# Allegro board PMOD2BNCSIMPLE_v1_06_65mil.brd
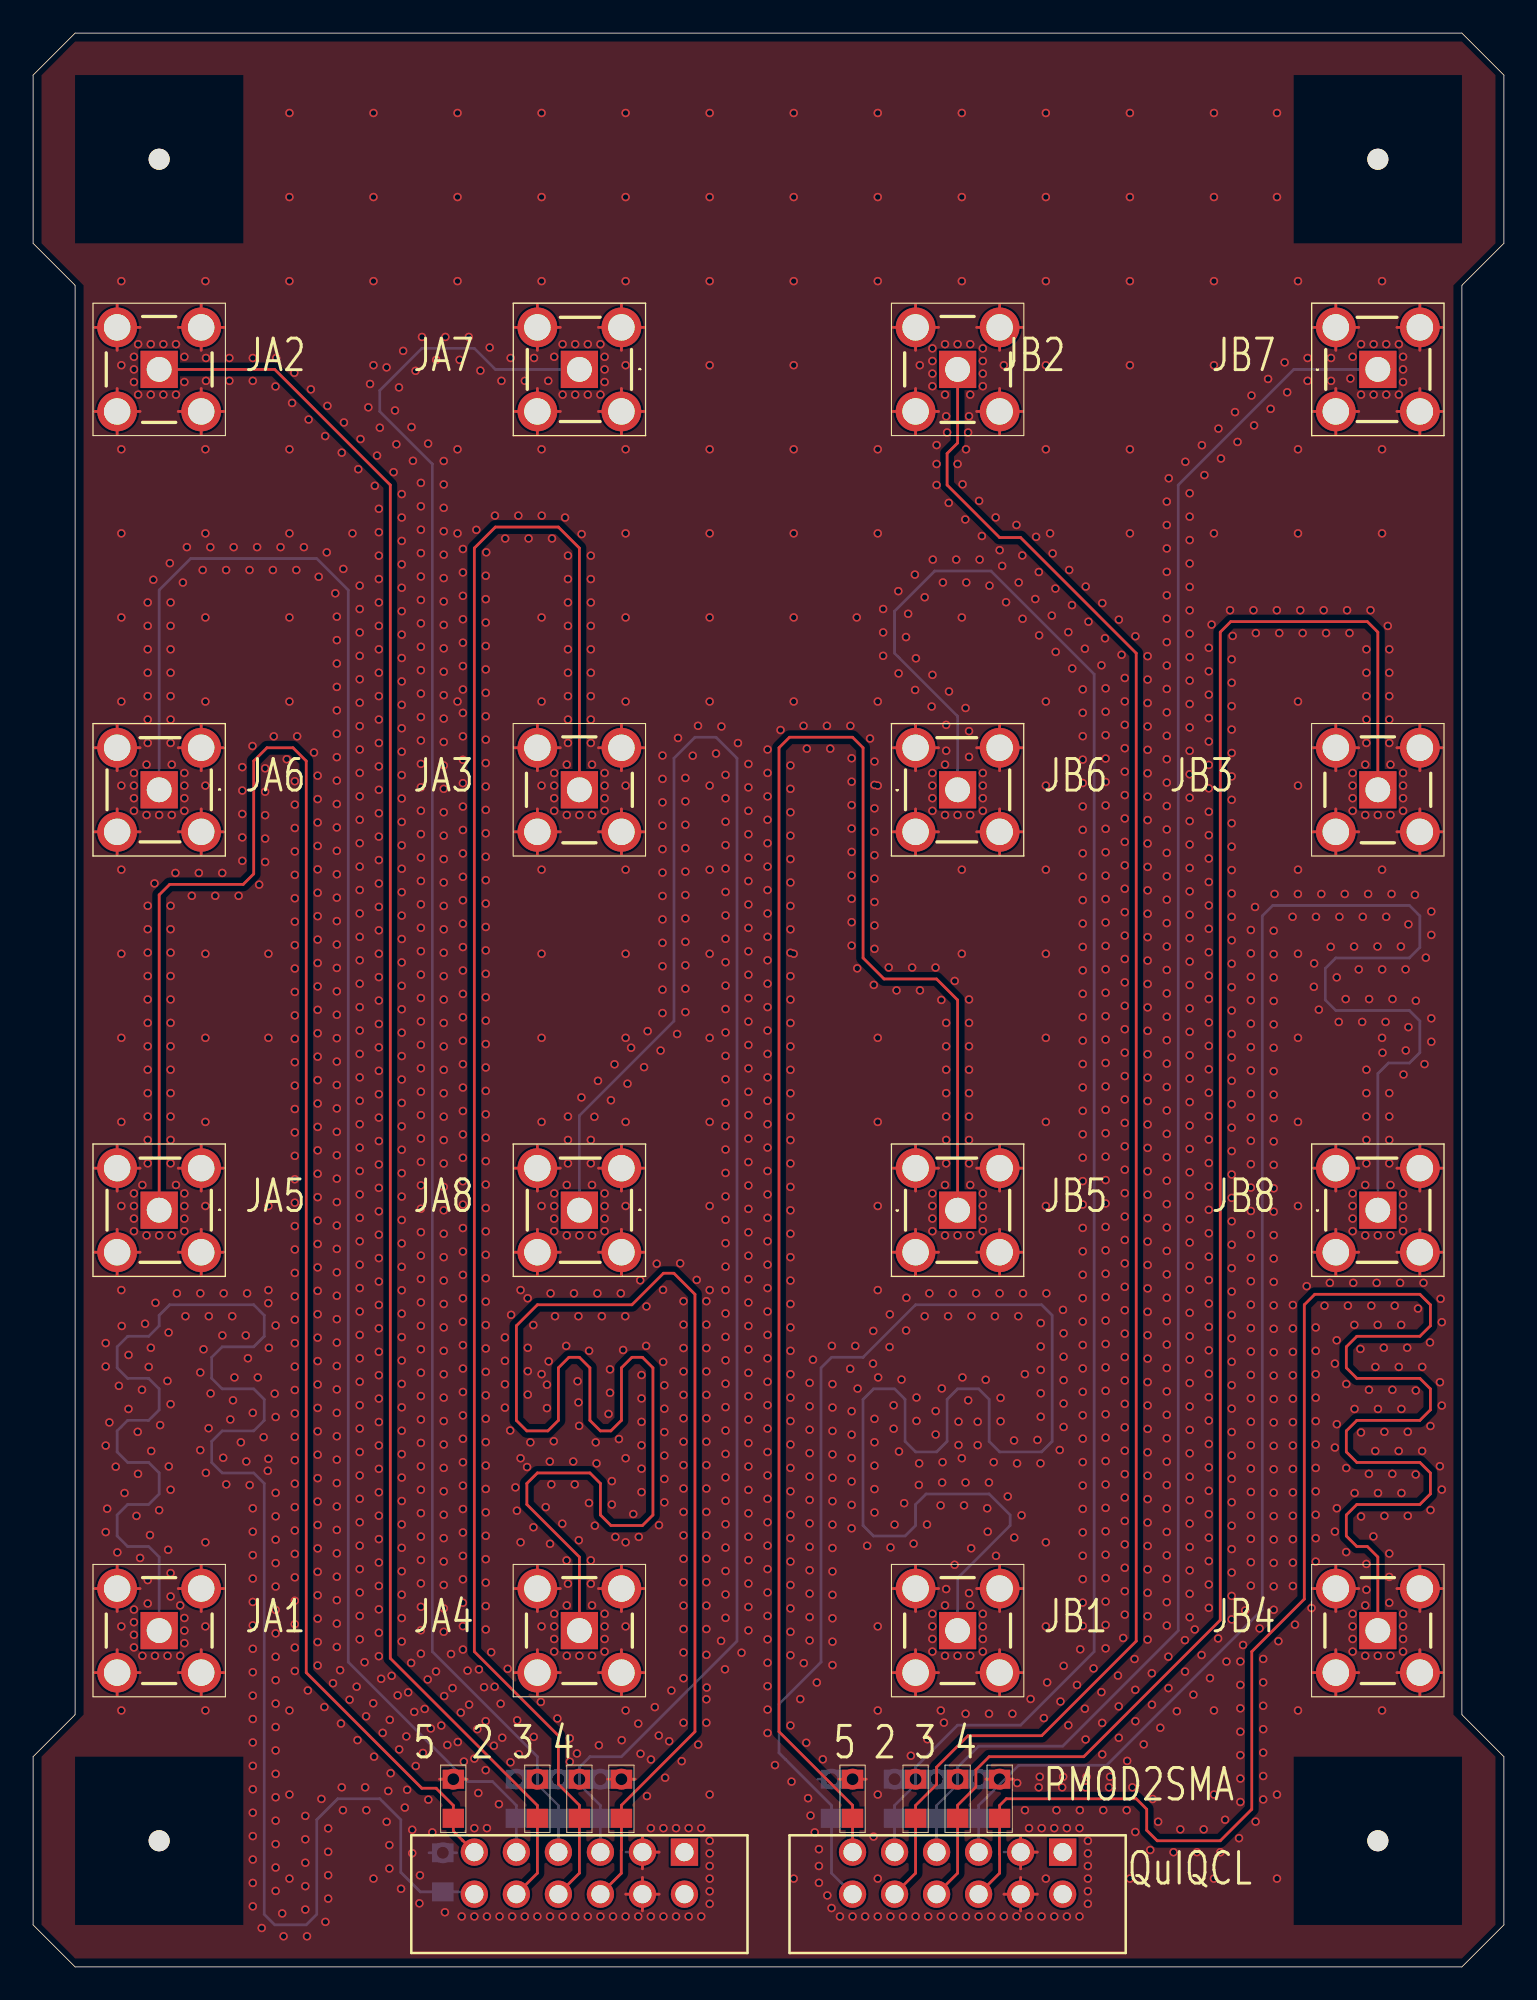
[diagram p0: board, top side]
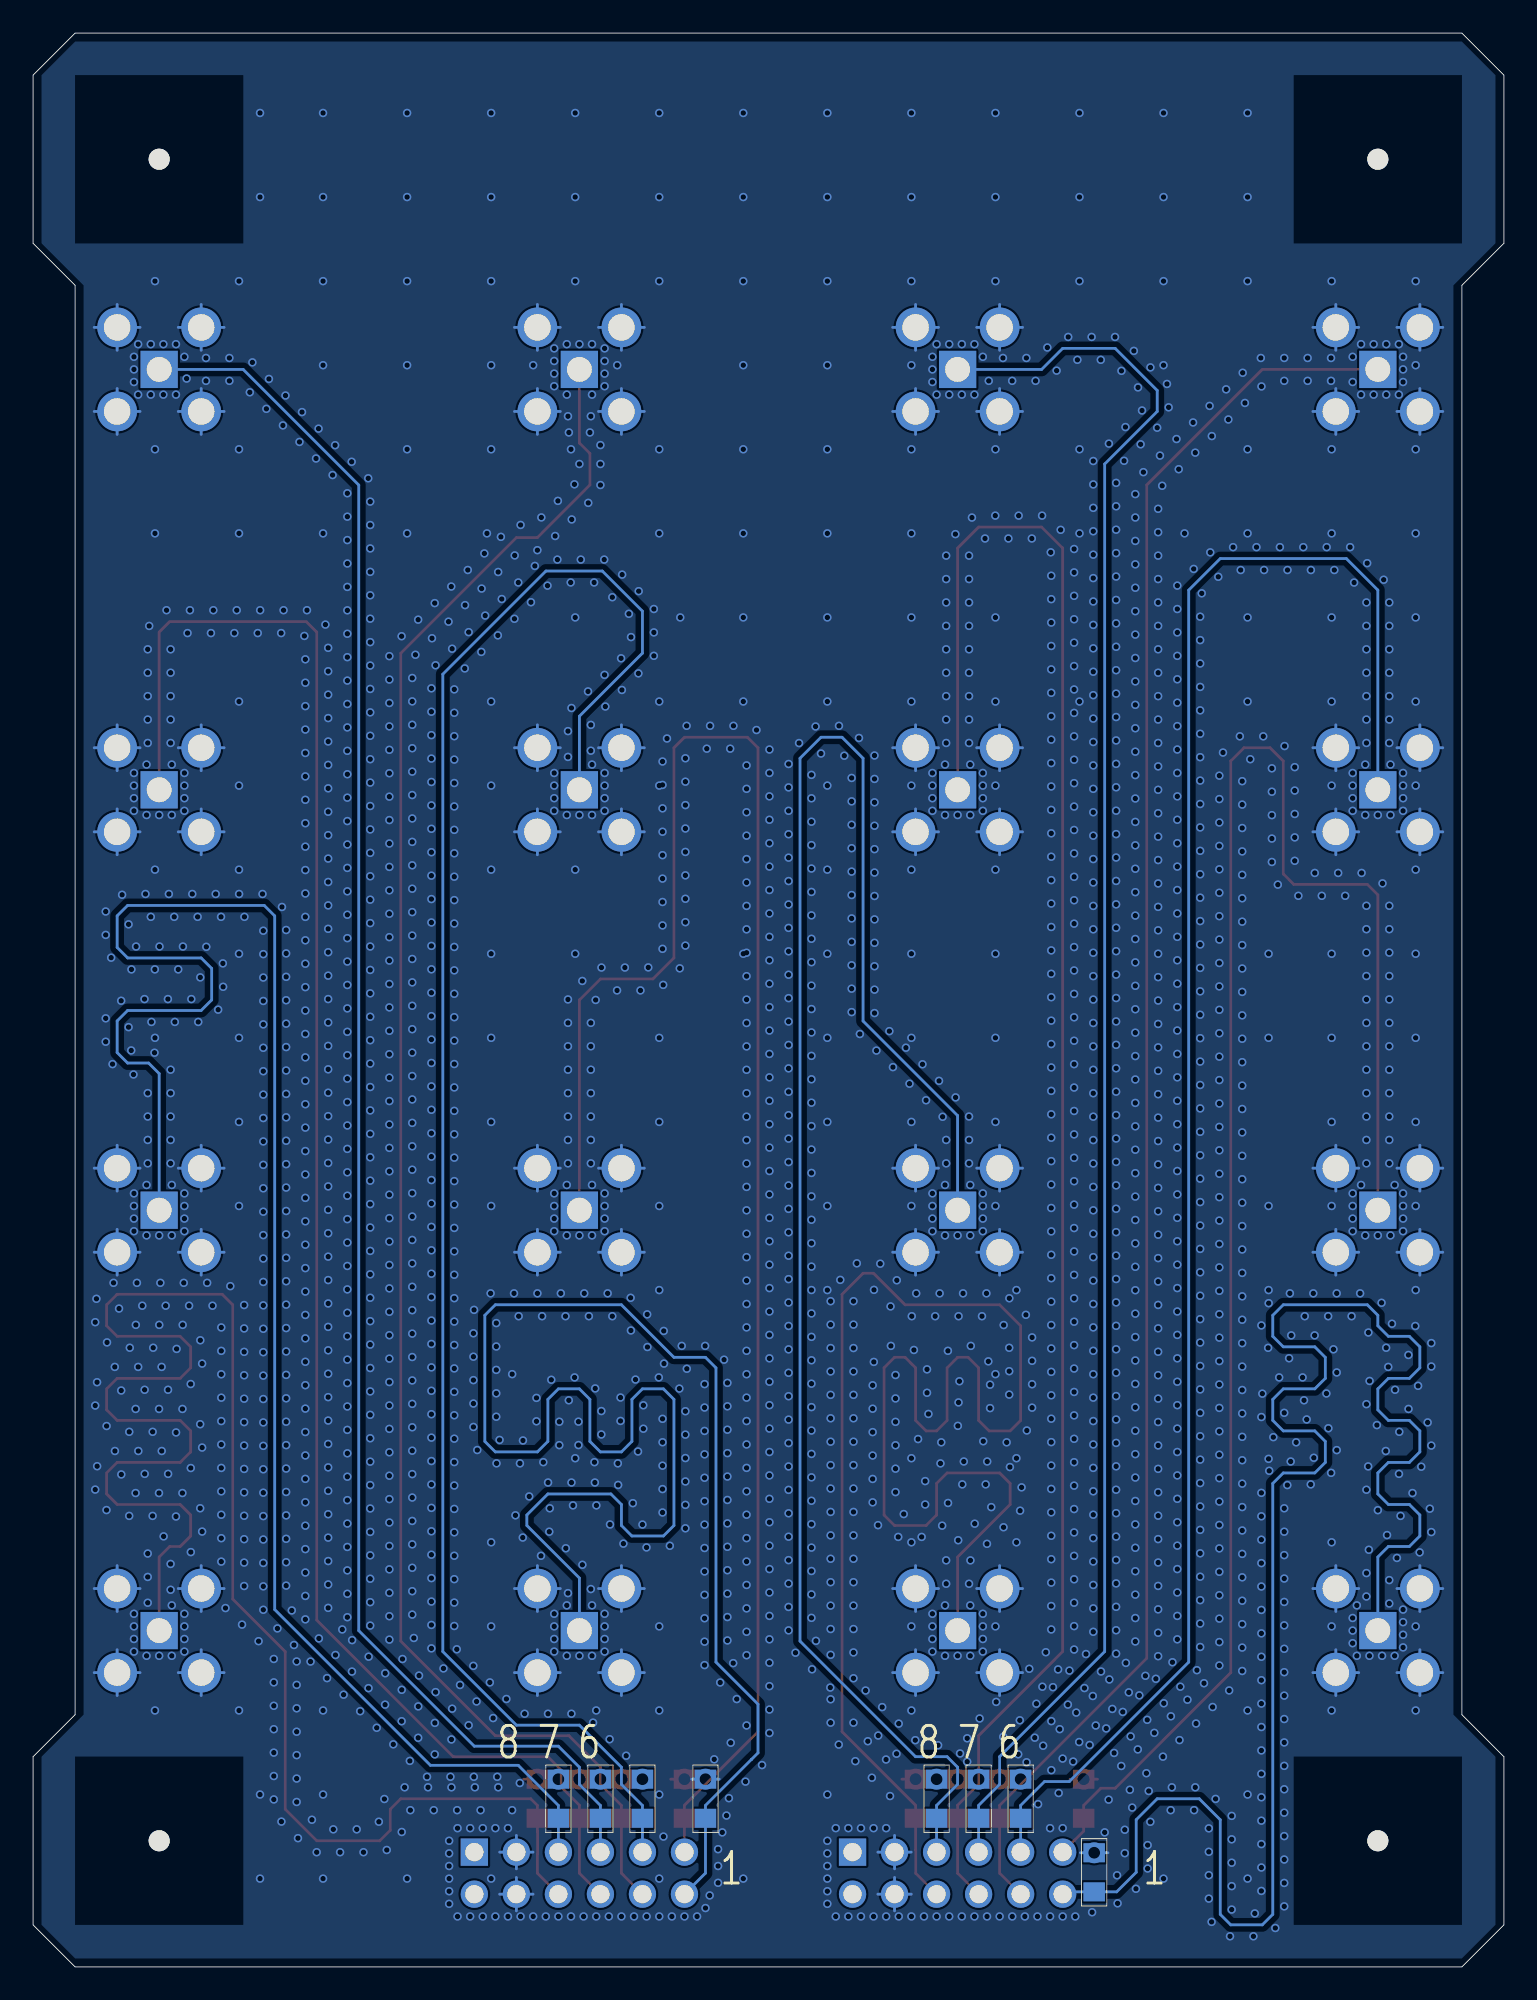
[diagram p1: board, bottom side, seen from below]

Outline 88.9 x 116.84 mm; copper layers: TOP, GND1, GND2, BOTTOM. Coordinates in mm from the lower left corner of the outline.
Outline path: 0,114.3 0,104.14 2.54,101.6 2.54,15.24 0,12.7 0,2.54 2.54,0 86.36,0 88.9,2.54 88.9,12.7 86.36,15.24 86.36,101.6 88.9,104.14 88.9,114.3 86.36,116.84 2.54,116.84 0,114.3

## Design rules (mm)
nets with their own width: min track width 0.165; nets GND N17882 N17894 N17906 N17918 N17930 N17948 N17973 N17998 N19655 N19661 N19667 N19673 N19679 N19687 N19697 N19707

## Placement (name value [footprint] x y rotation side)
J1  71764_0114  [717640112]  22.86 0.84 180 top
J2  71764_0114  [717640112]  45.72 0.84 180 top
NOREF  -  [unnamed]  81.28 7.62 0 top
NOREF#2  -  [unnamed]  7.62 7.62 0 top
NOREF#3  -  [unnamed]  7.62 109.22 0 top
NOREF#4  -  [unnamed]  81.28 109.22 0 top
R1  -  [RES_0805]  34.29 10.16 90 bottom
R2  -  [RES_0805]  31.75 10.16 90 bottom
R3  -  [RES_0805]  29.21 10.16 90 bottom
R4  -  [RES_0805]  25.4 10.16 90 top
R5  -  [RES_0805]  24.77 5.71 90 bottom
R6  -  [RES_0805]  30.48 10.16 90 top
R7  -  [RES_0805]  33.02 10.16 90 top
R8  -  [RES_0805]  35.56 10.16 90 top
R9  -  [RES_0805]  57.15 10.16 90 bottom
R10  -  [RES_0805]  54.61 10.16 90 bottom
R11  -  [RES_0805]  52.07 10.16 90 bottom
R12  -  [RES_0805]  49.53 10.16 90 top
R13  -  [RES_0805]  48.26 10.16 90 bottom
R14  -  [RES_0805]  53.34 10.16 90 top
R15  -  [RES_0805]  55.88 10.16 90 top
R16  -  [RES_0805]  58.42 10.16 90 top
U1  -  [SMA-R-RA]  7.62 45.72 180 top
U2  -  [SMAFST_PCBN]  7.62 20.32 180 top
U3  -  [SMA-R-RA]  7.62 71.12 180 top
U4  -  [SMAFST_PCBN]  7.62 96.52 180 top
U5  -  [SMA-R-RA]  33.02 96.52 180 top
U6  -  [SMAFST_PCBN]  33.02 71.12 180 top
U7  -  [SMA-R-RA]  33.02 45.72 180 top
U8  -  [SMAFST_PCBN]  33.02 20.32 180 top
U9  -  [SMA-R-RA]  55.88 45.72 0 top
U10  -  [SMAFST_PCBN]  55.88 20.32 180 top
U11  -  [SMA-R-RA]  55.88 71.12 0 top
U12  -  [SMAFST_PCBN]  55.88 96.52 180 top
U13  -  [SMA-R-RA]  81.28 96.52 0 top
U14  -  [SMAFST_PCBN]  81.28 71.12 180 top
U15  -  [SMA-R-RA]  81.28 45.72 0 top
U16  -  [SMAFST_PCBN]  81.28 20.32 180 top

## Library data of the parts
J1 J2 = 71764_0114
R1-R3 R5-R16 = RES_0805
R4 = RES_0805: signal model: resistorPack_850
U1 U3 U5 U7 U9 U11 U13 U15 = SMA-R-RA
U2 U4 U6 U8 U10 U12 U14 U16 = SMAFST_PCBN

## Footprints (pads in the part's own frame, mm; a bottom-side part is the same pattern mirrored in y, then rotated)
717640112
  rect 1.651x1.651 hole 1.1: 1(-16.51,-6.096)
  round 1.651 hole 1.1: 2(-16.51,-3.556) 3(-13.97,-6.096) 4(-13.97,-3.556) 5(-11.43,-6.096) 6(-11.43,-3.556) 7(-8.89,-6.096) 8(-8.89,-3.556) 9(-6.35,-6.096) 10(-6.35,-3.556) 11(-3.81,-6.096) 12(-3.81,-3.556)
RES_0805
  rect 1.151x1.3 smd: 1(1.181,0) 2(-1.181,0)
SMA-R-RA
  rect 2.25x2.25 hole 1.501: 1(0,0)
  round 2.4 hole 1.6: 2(-2.54,2.54) 3(-2.54,-2.54) 4(2.54,-2.54) 5(2.54,2.54)
SMAFST_PCBN
  rect 2.25x2.25 hole 1.501: 1(0,0)
  round 2.4 hole 1.6: 2(-2.54,-2.54) 3(2.54,-2.54) 4(2.54,2.54) 5(-2.54,2.54)
unnamed
  round 1.27 hole 6.35 unplated: (0,0)

## Nets
GND: J1.3 J1.4 J2.3 J2.4 R1.1 R2.1 R3.1 R4.1 R5.1 R6.1 R7.1 R8.1 R9.1 R10.1 R11.1 R12.1 R13.1 R14.1 R15.1 R16.1 U1.2 U1.3 U1.4 U1.5 U2.2 U2.3 U2.4 U2.5 U3.2 U3.3 U3.4 U3.5 U4.2 U4.3 U4.4 U4.5 U5.2 U5.3 U5.4 U5.5 U6.2 U6.3 U6.4 U6.5 U7.2 U7.3 U7.4 U7.5 U8.2 U8.3 U8.4 U8.5 U9.2 U9.3 U9.4 U9.5 U10.2 U10.3 U10.4 U10.5 U11.2 U11.3 U11.4 U11.5 U12.2 U12.3 U12.4 U12.5 U13.2 U13.3 U13.4 U13.5 U14.2 U14.3 U14.4 U14.5 U15.2 U15.3 U15.4 U15.5 U16.2 U16.3 U16.4 U16.5
N17882: J1.11 R4.2 U1.1
N17894: J1.9 R3.2 U3.1
N17906: J1.7 R2.2 U5.1
N17918: J1.5 R1.2 U7.1
N17930: J1.12 R5.2 U2.1
N17948: J1.10 R6.2 U4.1
N17973: J1.8 R7.2 U6.1
N17998: J1.6 R8.2 U8.1
N19655: J2.11 R12.2 U9.1
N19661: J2.9 R11.2 U11.1
N19667: J2.7 R10.2 U13.1
N19673: J2.5 R9.2 U15.1
N19679: J2.12 R13.2 U10.1
N19687: J2.10 R14.2 U12.1
N19697: J2.8 R15.2 U14.1
N19707: J2.6 R16.2 U16.1

Pads without a net: J1 1 2; J2 1 2

## Via types
v1: diameter 0.508, hole 0.33, TOP to BOTTOM, 2548 vias
v2: diameter 1.27, hole 0.711, TOP to GND1, 8 vias
v3: diameter 1.27, hole 0.711, GND2 to BOTTOM, 8 vias

## Routing (per net, layer and track width the routed paths; a pad name or vN(x,y) marks a point on that pad's centre or on a via; arc(x,y) is an arc through that point)
GND: length 1490
  TOP w0.165: U5.5 31.86,93.98 ; U5.5 29.1,93.98 ; U5.5 30.48,95.36 ; U5.5 30.48,92.6 ; 34.18,99.06 U5.3 ; U5.3 35.56,100.44 ; U5.3 35.56,97.68 ; U5.3 36.94,99.06 ; U12.2 59.8,99.06 ; U12.2 58.42,100.44 ; U12.2 58.42,97.68 ; U12.2 57.04,99.06 ; 78.74,41.8 U15.3 ; U15.3 77.36,43.18 ; U15.3 78.74,44.56 ; U15.3 80.12,43.18 ; 10.16,92.6 U4.5 ; U4.5 11.54,93.98 ; U4.5 8.78,93.98 ; U4.5 10.16,95.36 ; 8.78,22.86 U2.2 ; U2.2 11.54,22.86 ; U2.2 10.16,21.48 ; U2.2 10.16,24.24 ; 5.08,46.88 U1.4 ; U1.4 5.08,49.64 ; U1.4 6.46,48.26 ; U1.4 3.7,48.26 ; U8.2 36.94,22.86 ; U8.2 34.18,22.86 ; U8.2 35.56,24.24 ; U8.2 35.56,21.48 ; 53.34,67.2 U11.3 ; U11.3 53.34,69.96 ; U11.3 51.96,68.58 ; U11.3 54.72,68.58 ; 51.96,17.78 U10.4 ; U10.4 54.72,17.78 ; U10.4 53.34,19.16 ; U10.4 53.34,16.4 ; 8.78,99.06 U4.2 ; U4.2 10.16,97.68 ; U4.2 11.54,99.06 ; U4.2 10.16,100.44 ; 82.44,48.26 U15.5 ; U15.5 83.82,49.64 ; U15.5 85.2,48.26 ; U15.5 83.82,46.88 ; U9.2 53.34,49.64 ; U9.2 54.72,48.26 ; U9.2 51.96,48.26 ; U9.2 53.34,46.88 ; U6.5 35.56,69.96 ; U6.5 35.56,67.2 ; U6.5 34.18,68.58 ; U6.5 36.94,68.58 ; U10.5 59.8,17.78 ; U10.5 58.42,19.16 ; U10.5 57.04,17.78 ; U10.5 58.42,16.4 ; 36.83,3.39 J1.4 ; J1.4 35.82,4.39 ; J1.4 36.83,5.4 ; J1.4 37.84,4.39 ; 83.82,92.6 U13.4 ; U13.4 82.44,93.98 ; U13.4 83.82,95.36 ; U13.4 85.2,93.98 ; 30.48,97.68 U5.4 ; U5.4 29.1,99.06 ; U5.4 31.86,99.06 ; U5.4 30.48,100.44 ; 82.44,73.66 U14.2 ; U14.2 83.82,72.28 ; U14.2 83.82,75.04 ; U14.2 85.2,73.66 ; U6.2 35.56,75.04 ; U6.2 36.94,73.66 ; U6.2 35.56,72.28 ; U6.2 34.18,73.66 ; 36.83,5.93 J1.3 ; J1.3 36.83,7.94 ; J1.3 37.84,6.93 ; U7.2 36.94,43.18 ; U7.2 35.56,41.8 ; U7.2 34.18,43.18 ; U7.2 35.56,44.56 ; U6.3 30.48,75.04 ; U6.3 30.48,72.28 ; U6.3 31.86,73.66 ; U6.3 29.1,73.66 ; U9.4 58.42,44.56 ; U9.4 58.42,41.8 ; U9.4 57.04,43.18 ; U9.4 59.8,43.18 ; U3.2 11.54,68.58 ; U3.2 8.78,68.58 ; U3.2 10.16,69.96 ; U3.2 10.16,67.2 ; 77.36,99.06 U13.2 ; U13.2 78.74,97.68 ; U13.2 80.12,99.06 ; U13.2 78.74,100.44 ; 78.74,16.4 U16.4 ; U16.4 77.36,17.78 ; U16.4 78.74,19.16 ; U16.4 80.12,17.78 ; U2.5 10.16,19.16 ; U2.5 11.54,17.78 ; U2.5 8.78,17.78 ; U2.5 10.16,16.4 ; 83.82,67.2 U14.5 ; U14.5 83.82,69.96 ; U14.5 85.2,68.58 ; U14.5 82.44,68.58 ; U2.4 5.08,19.16 ; U2.4 3.7,17.78 ; U2.4 6.46,17.78 ; U2.4 5.08,16.4 ; 5.08,67.2 U3.5 ; U3.5 6.46,68.58 ; U3.5 5.08,69.96 ; U3.5 3.7,68.58 ; 30.48,16.4 U8.4 ; U8.4 30.48,19.16 ; U8.4 31.86,17.78 ; U8.4 29.1,17.78 ; U10.2 58.42,24.24 ; U10.2 57.04,22.86 ; U10.2 59.8,22.86 ; U10.2 58.42,21.48 ; U6.4 31.86,68.58 ; U6.4 29.1,68.58 ; U6.4 30.48,67.2 ; U6.4 30.48,69.96 ; 53.34,21.48 U10.3 ; U10.3 51.96,22.86 ; U10.3 53.34,24.24 ; U10.3 54.72,22.86 ; J2.4 60.7,4.39 ; J2.4 59.69,5.4 ; J2.4 58.68,4.39 ; J2.4 59.69,3.39 ; U12.4 53.34,95.36 ; U12.4 54.72,93.98 ; U12.4 51.96,93.98 ; U12.4 53.34,92.6 ; 51.96,43.18 U9.3 ; U9.3 54.72,43.18 ; U9.3 53.34,44.56 ; U9.3 53.34,41.8 ; 83.82,41.8 U15.4 ; U15.4 83.82,44.56 ; U15.4 85.2,43.18 ; U15.4 82.44,43.18 ; 34.18,93.98 U5.2 ; U5.2 36.94,93.98 ; U5.2 35.56,92.6 ; U5.2 35.56,95.36 ; U11.4 58.42,69.96 ; U11.4 59.8,68.58 ; U11.4 57.04,68.58 ; U11.4 58.42,67.2 ; 51.96,99.06 U12.3 ; U12.3 54.72,99.06 ; U12.3 53.34,97.68 ; U12.3 53.34,100.44 ; U1.2 10.16,44.56 ; U1.2 11.54,43.18 ; U1.2 10.16,41.8 ; U1.2 8.78,43.18 ; U11.2 54.72,73.66 ; U11.2 53.34,72.28 ; U11.2 53.34,75.04 ; U11.2 51.96,73.66 ; 34.18,48.26 U7.3 ; U7.3 36.94,48.26 ; U7.3 35.56,46.88 ; U7.3 35.56,49.64 ; J2.3 59.69,7.94 ; J2.3 60.7,6.93 ; J2.3 59.69,5.93 ; U16.2 85.2,22.86 ; U16.2 83.82,21.48 ; U16.2 83.82,24.24 ; U16.2 82.44,22.86 ; U7.4 30.48,49.64 ; U7.4 30.48,46.88 ; U7.4 29.1,48.26 ; U7.4 31.86,48.26 ; U14.3 78.74,75.04 ; U14.3 80.12,73.66 ; U14.3 77.36,73.66 ; U14.3 78.74,72.28 ; 10.16,46.88 U1.3 ; U1.3 11.54,48.26 ; U1.3 10.16,49.64 ; U1.3 8.78,48.26 ; 50.36,11.34 v2(49.53,11.34) 48.7,11.34 ; 78.74,92.6 U13.3 ; U13.3 80.12,93.98 ; U13.3 78.74,95.36 ; U13.3 77.36,93.98 ; U14.4 78.74,69.96 ; U14.4 77.36,68.58 ; U14.4 78.74,67.2 ; U14.4 80.12,68.58 ; 77.36,48.26 U15.2 ; U15.2 78.74,46.88 ; U15.2 78.74,49.64 ; U15.2 80.12,48.26 ; U4.4 6.46,93.98 ; U4.4 3.7,93.98 ; U4.4 5.08,95.36 ; U4.4 5.08,92.6 ; 59.25,11.34 v2(58.42,11.34) 57.59,11.34 ; 83.82,97.68 U13.5 ; U13.5 83.82,100.44 ; U13.5 85.2,99.06 ; U13.5 82.44,99.06 ; 5.08,97.68 U4.3 ; U4.3 5.08,100.44 ; U4.3 6.46,99.06 ; U4.3 3.7,99.06 ; 77.36,22.86 U16.3 ; U16.3 78.74,21.48 ; U16.3 78.74,24.24 ; U16.3 80.12,22.86 ; 34.18,17.78 U8.5 ; U8.5 36.94,17.78 ; U8.5 35.56,16.4 ; U8.5 35.56,19.16 ; 3.7,73.66 U3.4 ; U3.4 5.08,75.04 ; U3.4 5.08,72.28 ; U3.4 6.46,73.66 ; 57.04,73.66 U11.5 ; U11.5 59.8,73.66 ; U11.5 58.42,75.04 ; U11.5 58.42,72.28 ; 58.42,46.88 U9.5 ; U9.5 59.8,48.26 ; U9.5 58.42,49.64 ; U9.5 57.04,48.26 ; U16.5 83.82,19.16 ; U16.5 82.44,17.78 ; U16.5 85.2,17.78 ; U16.5 83.82,16.4 ; U2.3 6.46,22.86 ; U2.3 5.08,21.48 ; U2.3 5.08,24.24 ; U2.3 3.7,22.86 ; 8.78,73.66 U3.3 ; U3.3 11.54,73.66 ; U3.3 10.16,72.28 ; U3.3 10.16,75.04 ; U12.5 58.42,95.36 ; U12.5 58.42,92.6 ; U12.5 59.8,93.98 ; U12.5 57.04,93.98 ; 30.48,21.48 U8.3 ; U8.3 29.1,22.86 ; U8.3 31.86,22.86 ; U8.3 30.48,24.24 ; 3.7,43.18 U1.5 ; U1.5 5.08,44.56 ; U1.5 6.46,43.18 ; U1.5 5.08,41.8 ; 34.73,11.34 v2(35.56,11.34) 36.39,11.34 ; 26.23,11.34 v2(25.4,11.34) 24.57,11.34 ; U7.5 30.48,44.56 ; U7.5 30.48,41.8 ; U7.5 29.1,43.18 ; U7.5 31.86,43.18
  GND1 w0.165: U4.4 6.46,93.98 ; U4.4 3.7,93.98 ; U4.4 5.08,95.36 ; U4.4 5.08,92.6 ; 83.82,21.48 U16.2 ; U16.2 82.44,22.86 ; U16.2 85.2,22.86 ; U16.2 83.82,24.24 ; U7.2 35.56,44.56 ; U7.2 34.18,43.18 ; U7.2 35.56,41.8 ; U7.2 36.94,43.18 ; U3.2 11.54,68.58 ; U3.2 10.16,67.2 ; U3.2 10.16,69.96 ; U3.2 8.78,68.58 ; 83.82,67.2 U14.5 ; U14.5 85.2,68.58 ; U14.5 82.44,68.58 ; U14.5 83.82,69.96 ; U5.3 35.56,100.44 ; U5.3 34.18,99.06 ; U5.3 35.56,97.68 ; U5.3 36.94,99.06 ; J1.3 36.83,7.94 ; J1.3 35.82,6.93 ; J1.3 37.84,6.93 ; J1.3 36.83,5.93 ; 57.04,17.78 U10.5 ; U10.5 58.42,19.16 ; U10.5 59.8,17.78 ; U10.5 58.42,16.4 ; 58.42,72.28 U11.5 ; U11.5 59.8,73.66 ; U11.5 57.04,73.66 ; U11.5 58.42,75.04 ; 83.82,41.8 U15.4 ; U15.4 85.2,43.18 ; U15.4 82.44,43.18 ; U15.4 83.82,44.56 ; J1.4 37.84,4.39 ; J1.4 36.83,3.39 ; J1.4 36.83,5.4 ; J1.4 35.82,4.39 ; U15.5 85.2,48.26 ; U15.5 82.44,48.26 ; U15.5 83.82,49.64 ; U15.5 83.82,46.88 ; 77.36,22.86 U16.3 ; U16.3 78.74,21.48 ; U16.3 78.74,24.24 ; U16.3 80.12,22.86 ; 58.68,6.93 J2.3 ; J2.3 59.69,7.94 ; J2.3 59.69,5.93 ; J2.3 60.7,6.93 ; U12.3 54.72,99.06 ; U12.3 51.96,99.06 ; U12.3 53.34,97.68 ; U12.3 53.34,100.44 ; 30.48,67.2 U6.4 ; U6.4 29.1,68.58 ; U6.4 30.48,69.96 ; U6.4 31.86,68.58 ; 5.08,16.4 U2.4 ; U2.4 6.46,17.78 ; U2.4 3.7,17.78 ; U2.4 5.08,19.16 ; U3.5 5.08,69.96 ; U3.5 5.08,67.2 ; U3.5 6.46,68.58 ; U3.5 3.7,68.58 ; U7.3 35.56,49.64 ; U7.3 36.94,48.26 ; U7.3 35.56,46.88 ; U7.3 34.18,48.26 ; U10.4 53.34,19.16 ; U10.4 54.72,17.78 ; U10.4 51.96,17.78 ; U10.4 53.34,16.4 ; 30.48,72.28 U6.3 ; U6.3 29.1,73.66 ; U6.3 30.48,75.04 ; U6.3 31.86,73.66 ; U7.4 31.86,48.26 ; U7.4 29.1,48.26 ; U7.4 30.48,46.88 ; U7.4 30.48,49.64 ; 51.96,93.98 U12.4 ; U12.4 53.34,95.36 ; U12.4 54.72,93.98 ; U12.4 53.34,92.6 ; U8.4 31.86,17.78 ; U8.4 30.48,19.16 ; U8.4 30.48,16.4 ; U8.4 29.1,17.78 ; U16.4 78.74,19.16 ; U16.4 78.74,16.4 ; U16.4 77.36,17.78 ; U16.4 80.12,17.78 ; 59.69,3.39 J2.4 ; J2.4 59.69,5.4 ; J2.4 60.7,4.39 ; J2.4 58.68,4.39 ; U11.3 53.34,69.96 ; U11.3 51.96,68.58 ; U11.3 54.72,68.58 ; U11.3 53.34,67.2 ; 57.04,43.18 U9.4 ; U9.4 58.42,41.8 ; U9.4 59.8,43.18 ; U9.4 58.42,44.56 ; 5.08,41.8 U1.5 ; U1.5 5.08,44.56 ; U1.5 3.7,43.18 ; U1.5 6.46,43.18 ; 82.44,73.66 U14.2 ; U14.2 83.82,72.28 ; U14.2 85.2,73.66 ; U14.2 83.82,75.04 ; U14.3 78.74,75.04 ; U14.3 77.36,73.66 ; U14.3 80.12,73.66 ; U14.3 78.74,72.28 ; U13.4 83.82,95.36 ; U13.4 85.2,93.98 ; U13.4 82.44,93.98 ; U13.4 83.82,92.6 ; 30.48,21.48 U8.3 ; U8.3 31.86,22.86 ; U8.3 29.1,22.86 ; U8.3 30.48,24.24 ; U4.3 6.46,99.06 ; U4.3 5.08,97.68 ; U4.3 5.08,100.44 ; U4.3 3.7,99.06 ; 8.78,48.26 U1.3 ; U1.3 10.16,49.64 ; U1.3 11.54,48.26 ; U1.3 10.16,46.88 ; U2.2 11.54,22.86 ; U2.2 10.16,24.24 ; U2.2 8.78,22.86 ; U2.2 10.16,21.48 ; 29.1,43.18 U7.5 ; U7.5 30.48,41.8 ; U7.5 30.48,44.56 ; U7.5 31.86,43.18 ; U8.5 36.94,17.78 ; U8.5 34.18,17.78 ; U8.5 35.56,19.16 ; U8.5 35.56,16.4 ; 35.56,67.2 U6.5 ; U6.5 36.94,68.58 ; U6.5 34.18,68.58 ; U6.5 35.56,69.96 ; 78.74,97.68 U13.2 ; U13.2 80.12,99.06 ; U13.2 77.36,99.06 ; U13.2 78.74,100.44 ; 3.7,22.86 U2.3 ; U2.3 5.08,21.48 ; U2.3 5.08,24.24 ; U2.3 6.46,22.86 ; U11.2 54.72,73.66 ; U11.2 51.96,73.66 ; U11.2 53.34,72.28 ; U11.2 53.34,75.04 ; U6.2 36.94,73.66 ; U6.2 34.18,73.66 ; U6.2 35.56,72.28 ; U6.2 35.56,75.04 ; 78.74,67.2 U14.4 ; U14.4 77.36,68.58 ; U14.4 78.74,69.96 ; U14.4 80.12,68.58 ; 10.16,92.6 U4.5 ; U4.5 10.16,95.36 ; U4.5 11.54,93.98 ; U4.5 8.78,93.98 ; 77.36,93.98 U13.3 ; U13.3 80.12,93.98 ; U13.3 78.74,92.6 ; U13.3 78.74,95.36 ; U5.2 35.56,95.36 ; U5.2 34.18,93.98 ; U5.2 35.56,92.6 ; U5.2 36.94,93.98 ; 8.78,99.06 U4.2 ; U4.2 10.16,100.44 ; U4.2 11.54,99.06 ; U4.2 10.16,97.68 ; 8.78,17.78 U2.5 ; U2.5 11.54,17.78 ; U2.5 10.16,19.16 ; U2.5 10.16,16.4 ; U10.3 54.72,22.86 ; U10.3 53.34,24.24 ; U10.3 53.34,21.48 ; U10.3 51.96,22.86 ; 77.36,43.18 U15.3 ; U15.3 78.74,41.8 ; U15.3 78.74,44.56 ; U15.3 80.12,43.18 ; U5.4 31.86,99.06 ; U5.4 29.1,99.06 ; U5.4 30.48,97.68 ; U5.4 30.48,100.44 ; 82.44,99.06 U13.5 ; U13.5 85.2,99.06 ; U13.5 83.82,100.44 ; U13.5 83.82,97.68 ; 30.48,92.6 U5.5 ; U5.5 30.48,95.36 ; U5.5 31.86,93.98 ; U5.5 29.1,93.98 ; U8.2 36.94,22.86 ; U8.2 34.18,22.86 ; U8.2 35.56,24.24 ; U8.2 35.56,21.48 ; 53.34,41.8 U9.3 ; U9.3 53.34,44.56 ; U9.3 51.96,43.18 ; U9.3 54.72,43.18 ; 8.78,73.66 U3.3 ; U3.3 11.54,73.66 ; U3.3 10.16,75.04 ; U3.3 10.16,72.28 ; U9.2 54.72,48.26 ; U9.2 51.96,48.26 ; U9.2 53.34,49.64 ; U9.2 53.34,46.88 ; 5.08,72.28 U3.4 ; U3.4 5.08,75.04 ; U3.4 3.7,73.66 ; U3.4 6.46,73.66 ; U1.4 5.08,49.64 ; U1.4 3.7,48.26 ; U1.4 6.46,48.26 ; U1.4 5.08,46.88 ; U11.4 58.42,69.96 ; U11.4 58.42,67.2 ; U11.4 59.8,68.58 ; U11.4 57.04,68.58 ; U1.2 11.54,43.18 ; U1.2 8.78,43.18 ; U1.2 10.16,44.56 ; U1.2 10.16,41.8 ; U16.5 83.82,19.16 ; U16.5 83.82,16.4 ; U16.5 82.44,17.78 ; U16.5 85.2,17.78 ; 77.36,48.26 U15.2 ; U15.2 78.74,49.64 ; U15.2 80.12,48.26 ; U15.2 78.74,46.88 ; 58.42,92.6 U12.5 ; U12.5 59.8,93.98 ; U12.5 57.04,93.98 ; U12.5 58.42,95.36 ; 58.42,97.68 U12.2 ; U12.2 59.8,99.06 ; U12.2 57.04,99.06 ; U12.2 58.42,100.44 ; 57.04,22.86 U10.2 ; U10.2 59.8,22.86 ; U10.2 58.42,24.24 ; U10.2 58.42,21.48 ; 57.04,48.26 U9.5 ; U9.5 59.8,48.26 ; U9.5 58.42,49.64 ; U9.5 58.42,46.88
  GND2 w0.165: J2.4 59.69,5.4 ; J2.4 58.68,4.39 ; J2.4 59.69,3.39 ; J2.4 60.7,4.39 ; 57.04,68.58 U11.4 ; U11.4 58.42,67.2 ; U11.4 59.8,68.58 ; U11.4 58.42,69.96 ; U13.5 83.82,100.44 ; U13.5 83.82,97.68 ; U13.5 82.44,99.06 ; U13.5 85.2,99.06 ; 30.48,97.68 U5.4 ; U5.4 30.48,100.44 ; U5.4 29.1,99.06 ; U5.4 31.86,99.06 ; 35.56,46.88 U7.3 ; U7.3 36.94,48.26 ; U7.3 34.18,48.26 ; U7.3 35.56,49.64 ; U2.2 10.16,24.24 ; U2.2 10.16,21.48 ; U2.2 11.54,22.86 ; U2.2 8.78,22.86 ; 10.16,41.8 U1.2 ; U1.2 10.16,44.56 ; U1.2 11.54,43.18 ; U1.2 8.78,43.18 ; 3.7,93.98 U4.4 ; U4.4 5.08,92.6 ; U4.4 6.46,93.98 ; U4.4 5.08,95.36 ; 77.36,43.18 U15.3 ; U15.3 78.74,41.8 ; U15.3 80.12,43.18 ; U15.3 78.74,44.56 ; 82.44,17.78 U16.5 ; U16.5 85.2,17.78 ; U16.5 83.82,16.4 ; U16.5 83.82,19.16 ; 53.34,16.4 U10.4 ; U10.4 51.96,17.78 ; U10.4 53.34,19.16 ; U10.4 54.72,17.78 ; 3.7,43.18 U1.5 ; U1.5 6.46,43.18 ; U1.5 5.08,44.56 ; U1.5 5.08,41.8 ; U4.2 10.16,100.44 ; U4.2 11.54,99.06 ; U4.2 8.78,99.06 ; U4.2 10.16,97.68 ; 35.56,72.28 U6.2 ; U6.2 35.56,75.04 ; U6.2 34.18,73.66 ; U6.2 36.94,73.66 ; 30.48,72.28 U6.3 ; U6.3 29.1,73.66 ; U6.3 30.48,75.04 ; U6.3 31.86,73.66 ; 10.16,46.88 U1.3 ; U1.3 8.78,48.26 ; U1.3 11.54,48.26 ; U1.3 10.16,49.64 ; 29.1,17.78 U8.4 ; U8.4 30.48,19.16 ; U8.4 31.86,17.78 ; U8.4 30.48,16.4 ; 30.48,67.2 U6.4 ; U6.4 31.86,68.58 ; U6.4 29.1,68.58 ; U6.4 30.48,69.96 ; U16.4 80.12,17.78 ; U16.4 78.74,19.16 ; U16.4 77.36,17.78 ; U16.4 78.74,16.4 ; U11.5 59.8,73.66 ; U11.5 57.04,73.66 ; U11.5 58.42,75.04 ; U11.5 58.42,72.28 ; J2.3 59.69,7.94 ; J2.3 60.7,6.93 ; J2.3 59.69,5.93 ; J2.3 58.68,6.93 ; 5.08,21.48 U2.3 ; U2.3 5.08,24.24 ; U2.3 3.7,22.86 ; U2.3 6.46,22.86 ; U10.3 54.72,22.86 ; U10.3 53.34,24.24 ; U10.3 53.34,21.48 ; U10.3 51.96,22.86 ; 3.7,68.58 U3.5 ; U3.5 5.08,67.2 ; U3.5 6.46,68.58 ; U3.5 5.08,69.96 ; U13.4 85.2,93.98 ; U13.4 83.82,92.6 ; U13.4 82.44,93.98 ; U13.4 83.82,95.36 ; 51.96,73.66 U11.2 ; U11.2 53.34,75.04 ; U11.2 53.34,72.28 ; U11.2 54.72,73.66 ; 77.36,99.06 U13.2 ; U13.2 78.74,97.68 ; U13.2 78.74,100.44 ; U13.2 80.12,99.06 ; 30.48,46.88 U7.4 ; U7.4 29.1,48.26 ; U7.4 31.86,48.26 ; U7.4 30.48,49.64 ; 10.16,72.28 U3.3 ; U3.3 11.54,73.66 ; U3.3 8.78,73.66 ; U3.3 10.16,75.04 ; U7.5 31.86,43.18 ; U7.5 30.48,41.8 ; U7.5 29.1,43.18 ; U7.5 30.48,44.56 ; U7.2 35.56,44.56 ; U7.2 34.18,43.18 ; U7.2 35.56,41.8 ; U7.2 36.94,43.18 ; 78.74,46.88 U15.2 ; U15.2 77.36,48.26 ; U15.2 78.74,49.64 ; U15.2 80.12,48.26 ; U12.4 53.34,95.36 ; U12.4 53.34,92.6 ; U12.4 51.96,93.98 ; U12.4 54.72,93.98 ; 82.44,73.66 U14.2 ; U14.2 85.2,73.66 ; U14.2 83.82,72.28 ; U14.2 83.82,75.04 ; U8.2 35.56,24.24 ; U8.2 36.94,22.86 ; U8.2 35.56,21.48 ; U8.2 34.18,22.86 ; 35.82,6.93 J1.3 ; J1.3 36.83,5.93 ; J1.3 37.84,6.93 ; J1.3 36.83,7.94 ; 53.34,97.68 U12.3 ; U12.3 54.72,99.06 ; U12.3 51.96,99.06 ; U12.3 53.34,100.44 ; 5.08,46.88 U1.4 ; U1.4 3.7,48.26 ; U1.4 5.08,49.64 ; U1.4 6.46,48.26 ; U2.4 6.46,17.78 ; U2.4 3.7,17.78 ; U2.4 5.08,16.4 ; U2.4 5.08,19.16 ; 51.96,48.26 U9.2 ; U9.2 53.34,46.88 ; U9.2 53.34,49.64 ; U9.2 54.72,48.26 ; J1.4 36.83,5.4 ; J1.4 36.83,3.39 ; J1.4 37.84,4.39 ; J1.4 35.82,4.39 ; U4.5 11.54,93.98 ; U4.5 8.78,93.98 ; U4.5 10.16,95.36 ; U4.5 10.16,92.6 ; 8.78,68.58 U3.2 ; U3.2 10.16,67.2 ; U3.2 11.54,68.58 ; U3.2 10.16,69.96 ; U3.4 5.08,75.04 ; U3.4 3.7,73.66 ; U3.4 5.08,72.28 ; U3.4 6.46,73.66 ; U9.3 53.34,44.56 ; U9.3 54.72,43.18 ; U9.3 53.34,41.8 ; U9.3 51.96,43.18 ; U5.5 30.48,95.36 ; U5.5 31.86,93.98 ; U5.5 29.1,93.98 ; U5.5 30.48,92.6 ; 35.56,16.4 U8.5 ; U8.5 34.18,17.78 ; U8.5 36.94,17.78 ; U8.5 35.56,19.16 ; 77.36,68.58 U14.4 ; U14.4 80.12,68.58 ; U14.4 78.74,69.96 ; U14.4 78.74,67.2 ; U10.5 58.42,19.16 ; U10.5 57.04,17.78 ; U10.5 59.8,17.78 ; U10.5 58.42,16.4 ; U14.3 78.74,75.04 ; U14.3 77.36,73.66 ; U14.3 78.74,72.28 ; U14.3 80.12,73.66 ; 58.42,97.68 U12.2 ; U12.2 59.8,99.06 ; U12.2 57.04,99.06 ; U12.2 58.42,100.44 ; 30.48,21.48 U8.3 ; U8.3 31.86,22.86 ; U8.3 30.48,24.24 ; U8.3 29.1,22.86 ; U11.3 54.72,68.58 ; U11.3 51.96,68.58 ; U11.3 53.34,67.2 ; U11.3 53.34,69.96 ; U4.3 6.46,99.06 ; U4.3 5.08,97.68 ; U4.3 5.08,100.44 ; U4.3 3.7,99.06 ; U10.2 58.42,24.24 ; U10.2 58.42,21.48 ; U10.2 59.8,22.86 ; U10.2 57.04,22.86 ; U14.5 83.82,69.96 ; U14.5 83.82,67.2 ; U14.5 82.44,68.58 ; U14.5 85.2,68.58 ; 58.42,46.88 U9.5 ; U9.5 57.04,48.26 ; U9.5 59.8,48.26 ; U9.5 58.42,49.64 ; U16.2 83.82,24.24 ; U16.2 85.2,22.86 ; U16.2 82.44,22.86 ; U16.2 83.82,21.48 ; U15.5 83.82,49.64 ; U15.5 83.82,46.88 ; U15.5 82.44,48.26 ; U15.5 85.2,48.26 ; U2.5 10.16,19.16 ; U2.5 11.54,17.78 ; U2.5 10.16,16.4 ; U2.5 8.78,17.78 ; 78.74,92.6 U13.3 ; U13.3 80.12,93.98 ; U13.3 77.36,93.98 ; U13.3 78.74,95.36 ; 35.56,67.2 U6.5 ; U6.5 34.18,68.58 ; U6.5 35.56,69.96 ; U6.5 36.94,68.58 ; U15.4 85.2,43.18 ; U15.4 83.82,44.56 ; U15.4 82.44,43.18 ; U15.4 83.82,41.8 ; U5.3 35.56,100.44 ; U5.3 34.18,99.06 ; U5.3 36.94,99.06 ; U5.3 35.56,97.68 ; 34.18,93.98 U5.2 ; U5.2 35.56,95.36 ; U5.2 35.56,92.6 ; U5.2 36.94,93.98 ; 57.04,93.98 U12.5 ; U12.5 58.42,92.6 ; U12.5 59.8,93.98 ; U12.5 58.42,95.36 ; U16.3 78.74,24.24 ; U16.3 78.74,21.48 ; U16.3 80.12,22.86 ; U16.3 77.36,22.86 ; 57.04,43.18 U9.4 ; U9.4 59.8,43.18 ; U9.4 58.42,44.56 ; U9.4 58.42,41.8
  BOTTOM w0.165: 82.44,73.66 U14.2 ; U14.2 83.82,72.28 ; U14.2 85.2,73.66 ; U14.2 83.82,75.04 ; U2.5 10.16,19.16 ; U2.5 8.78,17.78 ; U2.5 11.54,17.78 ; U2.5 10.16,16.4 ; 82.44,68.58 U14.5 ; U14.5 83.82,67.2 ; U14.5 83.82,69.96 ; U14.5 85.2,68.58 ; U11.5 59.8,73.66 ; U11.5 58.42,75.04 ; U11.5 58.42,72.28 ; U11.5 57.04,73.66 ; U15.4 83.82,44.56 ; U15.4 83.82,41.8 ; U15.4 85.2,43.18 ; U15.4 82.44,43.18 ; 34.18,22.86 U8.2 ; U8.2 36.94,22.86 ; U8.2 35.56,21.48 ; U8.2 35.56,24.24 ; U15.5 85.2,48.26 ; U15.5 83.82,49.64 ; U15.5 82.44,48.26 ; U15.5 83.82,46.88 ; 51.96,43.18 U9.3 ; U9.3 53.34,41.8 ; U9.3 53.34,44.56 ; U9.3 54.72,43.18 ; 82.44,99.06 U13.5 ; U13.5 83.82,100.44 ; U13.5 85.2,99.06 ; U13.5 83.82,97.68 ; U2.4 6.46,17.78 ; U2.4 3.7,17.78 ; U2.4 5.08,16.4 ; U2.4 5.08,19.16 ; U2.3 5.08,24.24 ; U2.3 3.7,22.86 ; U2.3 6.46,22.86 ; U2.3 5.08,21.48 ; U4.2 11.54,99.06 ; U4.2 8.78,99.06 ; U4.2 10.16,97.68 ; U4.2 10.16,100.44 ; 57.04,68.58 U11.4 ; U11.4 59.8,68.58 ; U11.4 58.42,69.96 ; U11.4 58.42,67.2 ; 10.16,46.88 U1.3 ; U1.3 8.78,48.26 ; U1.3 11.54,48.26 ; U1.3 10.16,49.64 ; 51.96,48.26 U9.2 ; U9.2 53.34,49.64 ; U9.2 54.72,48.26 ; U9.2 53.34,46.88 ; U10.3 54.72,22.86 ; U10.3 51.96,22.86 ; U10.3 53.34,21.48 ; U10.3 53.34,24.24 ; U10.4 53.34,19.16 ; U10.4 53.34,16.4 ; U10.4 54.72,17.78 ; U10.4 51.96,17.78 ; U8.3 31.86,22.86 ; U8.3 30.48,21.48 ; U8.3 29.1,22.86 ; U8.3 30.48,24.24 ; 30.48,41.8 U7.5 ; U7.5 31.86,43.18 ; U7.5 30.48,44.56 ; U7.5 29.1,43.18 ; U7.2 36.94,43.18 ; U7.2 34.18,43.18 ; U7.2 35.56,44.56 ; U7.2 35.56,41.8 ; 36.83,5.93 J1.3 ; J1.3 37.84,6.93 ; J1.3 36.83,7.94 ; J1.3 35.82,6.93 ; U12.5 59.8,93.98 ; U12.5 58.42,92.6 ; U12.5 58.42,95.36 ; U12.5 57.04,93.98 ; 30.48,16.4 U8.4 ; U8.4 30.48,19.16 ; U8.4 29.1,17.78 ; U8.4 31.86,17.78 ; J2.3 60.7,6.93 ; J2.3 59.69,5.93 ; J2.3 58.68,6.93 ; J2.3 59.69,7.94 ; 57.04,48.26 U9.5 ; U9.5 59.8,48.26 ; U9.5 58.42,46.88 ; U9.5 58.42,49.64 ; 8.78,68.58 U3.2 ; U3.2 10.16,69.96 ; U3.2 10.16,67.2 ; U3.2 11.54,68.58 ; 8.78,73.66 U3.3 ; U3.3 11.54,73.66 ; U3.3 10.16,72.28 ; U3.3 10.16,75.04 ; 47.43,11.34 v3(48.26,11.34) 49.09,11.34 ; U3.5 6.46,68.58 ; U3.5 5.08,67.2 ; U3.5 5.08,69.96 ; U3.5 3.7,68.58 ; 3.7,99.06 U4.3 ; U4.3 5.08,97.68 ; U4.3 5.08,100.44 ; U4.3 6.46,99.06 ; U7.3 35.56,49.64 ; U7.3 35.56,46.88 ; U7.3 36.94,48.26 ; U7.3 34.18,48.26 ; 29.1,73.66 U6.3 ; U6.3 30.48,75.04 ; U6.3 30.48,72.28 ; U6.3 31.86,73.66 ; U11.2 53.34,75.04 ; U11.2 51.96,73.66 ; U11.2 53.34,72.28 ; U11.2 54.72,73.66 ; 57.04,22.86 U10.2 ; U10.2 58.42,21.48 ; U10.2 59.8,22.86 ; U10.2 58.42,24.24 ; U13.3 80.12,93.98 ; U13.3 78.74,95.36 ; U13.3 78.74,92.6 ; U13.3 77.36,93.98 ; U13.2 78.74,100.44 ; U13.2 77.36,99.06 ; U13.2 80.12,99.06 ; U13.2 78.74,97.68 ; 8.78,43.18 U1.2 ; U1.2 10.16,41.8 ; U1.2 10.16,44.56 ; U1.2 11.54,43.18 ; 78.74,41.8 U15.3 ; U15.3 80.12,43.18 ; U15.3 78.74,44.56 ; U15.3 77.36,43.18 ; 10.16,21.48 U2.2 ; U2.2 11.54,22.86 ; U2.2 8.78,22.86 ; U2.2 10.16,24.24 ; U3.4 5.08,75.04 ; U3.4 6.46,73.66 ; U3.4 5.08,72.28 ; U3.4 3.7,73.66 ; 77.36,17.78 U16.4 ; U16.4 80.12,17.78 ; U16.4 78.74,19.16 ; U16.4 78.74,16.4 ; 5.08,46.88 U1.4 ; U1.4 3.7,48.26 ; U1.4 5.08,49.64 ; U1.4 6.46,48.26 ; 35.56,16.4 U8.5 ; U8.5 34.18,17.78 ; U8.5 36.94,17.78 ; U8.5 35.56,19.16 ; 78.74,46.88 U15.2 ; U15.2 78.74,49.64 ; U15.2 80.12,48.26 ; U15.2 77.36,48.26 ; U16.5 83.82,19.16 ; U16.5 85.2,17.78 ; U16.5 83.82,16.4 ; U16.5 82.44,17.78 ; U14.3 78.74,75.04 ; U14.3 78.74,72.28 ; U14.3 77.36,73.66 ; U14.3 80.12,73.66 ; 35.56,92.6 U5.2 ; U5.2 34.18,93.98 ; U5.2 36.94,93.98 ; U5.2 35.56,95.36 ; U10.5 59.8,17.78 ; U10.5 58.42,19.16 ; U10.5 57.04,17.78 ; U10.5 58.42,16.4 ; 29.1,99.06 U5.4 ; U5.4 30.48,100.44 ; U5.4 31.86,99.06 ; U5.4 30.48,97.68 ; U5.3 35.56,100.44 ; U5.3 36.94,99.06 ; U5.3 34.18,99.06 ; U5.3 35.56,97.68 ; 35.56,72.28 U6.2 ; U6.2 36.94,73.66 ; U6.2 35.56,75.04 ; U6.2 34.18,73.66 ; 29.1,48.26 U7.4 ; U7.4 30.48,46.88 ; U7.4 31.86,48.26 ; U7.4 30.48,49.64 ; 58.68,4.39 J2.4 ; J2.4 59.69,3.39 ; J2.4 60.7,4.39 ; J2.4 59.69,5.4 ; 58.42,97.68 U12.2 ; U12.2 59.8,99.06 ; U12.2 58.42,100.44 ; U12.2 57.04,99.06 ; U4.5 10.16,95.36 ; U4.5 8.78,93.98 ; U4.5 10.16,92.6 ; U4.5 11.54,93.98 ; U6.5 36.94,68.58 ; U6.5 35.56,67.2 ; U6.5 34.18,68.58 ; U6.5 35.56,69.96 ; U12.4 53.34,95.36 ; U12.4 54.72,93.98 ; U12.4 53.34,92.6 ; U12.4 51.96,93.98 ; U11.3 53.34,69.96 ; U11.3 51.96,68.58 ; U11.3 54.72,68.58 ; U11.3 53.34,67.2 ; U16.2 83.82,24.24 ; U16.2 83.82,21.48 ; U16.2 85.2,22.86 ; U16.2 82.44,22.86 ; U5.5 30.48,95.36 ; U5.5 30.48,92.6 ; U5.5 29.1,93.98 ; U5.5 31.86,93.98 ; 29.1,68.58 U6.4 ; U6.4 31.86,68.58 ; U6.4 30.48,67.2 ; U6.4 30.48,69.96 ; 5.08,92.6 U4.4 ; U4.4 3.7,93.98 ; U4.4 5.08,95.36 ; U4.4 6.46,93.98 ; U16.3 80.12,22.86 ; U16.3 78.74,21.48 ; U16.3 77.36,22.86 ; U16.3 78.74,24.24 ; 83.82,92.6 U13.4 ; U13.4 83.82,95.36 ; U13.4 85.2,93.98 ; U13.4 82.44,93.98 ; 58.42,41.8 U9.4 ; U9.4 58.42,44.56 ; U9.4 59.8,43.18 ; U9.4 57.04,43.18 ; U12.3 53.34,100.44 ; U12.3 54.72,99.06 ; U12.3 53.34,97.68 ; U12.3 51.96,99.06 ; U14.4 78.74,69.96 ; U14.4 77.36,68.58 ; U14.4 80.12,68.58 ; U14.4 78.74,67.2 ; 25.6,6.9 v3(24.77,6.9) 23.93,6.9 ; J1.4 36.83,5.4 ; J1.4 37.84,4.39 ; J1.4 36.83,3.39 ; J1.4 35.82,4.39 ; U1.5 6.46,43.18 ; U1.5 5.08,44.56 ; U1.5 5.08,41.8 ; U1.5 3.7,43.18
  vias: v1(4.39,37.69) v1(4.39,36.28) v1(4.39,31.5) v1(4.39,26.27) v1(4.48,27.68) v1(4.61,32.9) v1(5,30.22) v1(5.09,25.04) v1(5.19,35.11) v1(5.33,101.85) v1(5.33,96.77) v1(5.33,91.69) v1(5.33,86.61) v1(5.33,81.53) v1(5.33,76.45) v1(5.33,71.37) v1(5.33,66.29) v1(5.33,61.21) v1(5.33,56.13) v1(5.33,51.05) v1(5.33,45.97) v1(5.33,40.89) v1(5.36,38.72) v1(5.33,20.57) v1(5.33,15.49) v1(5.53,28.63) v1(5.77,36.97) v1(5.77,33.71) v1(6.1,97.28) v1(6.1,96.52) v1(6.1,95.76) v1(6.1,72.14) v1(6.1,71.37) v1(6.1,70.61) v1(6.1,69.85) v1(6.1,46.74) v1(6.1,45.97) v1(6.1,45.21) v1(6.1,44.45) v1(6.1,21.59) v1(6.1,20.83) v1(6.1,20.07) v1(6.1,19.3) v1(6.25,27.25) v1(6.35,98.04) v1(6.35,95) v1(6.32,32.33) v1(6.34,29.79) v1(6.47,24.71) v1(6.6,47.24) v1(6.58,34.87) v1(6.6,18.8) v1(6.77,38.86) v1(6.86,72.64) v1(6.86,69.6) v1(6.86,44.2) v1(6.93,82.44) v1(6.93,81.02) v1(6.93,79.61) v1(6.93,78.19) v1(6.93,76.78) v1(6.93,75.36) v1(6.93,73.95) v1(6.93,64.11) v1(6.93,62.7) v1(6.93,61.28) v1(6.93,59.87) v1(6.93,58.45) v1(6.93,57.04) v1(6.93,55.62) v1(6.93,54.21) v1(6.93,52.79) v1(6.93,51.38) v1(6.93,49.96) v1(6.93,48.55) v1(6.99,36.25) v1(6.93,23.37) v1(6.93,21.96) v1(7.06,26.09) v1(7.11,98.04) v1(7.11,95) v1(7.12,37.41) v1(7.14,31.17) v1(7.27,83.81) v1(7.34,65.47) v1(7.4,40.12) v1(7.37,18.8) v1(7.62,69.6) v1(7.62,44.2) v1(7.68,32.74) v1(7.62,27.59) v1(7.87,98.04) v1(7.87,95) v1(8.19,38.33) v1(8.12,35.4) v1(8.2,30.24) v1(8.16,25.2) v1(8.13,18.8) v1(8.27,84.81) v1(8.31,82.44) v1(8.31,81.02) v1(8.31,79.61) v1(8.31,78.19) v1(8.31,76.78) v1(8.31,75.36) v1(8.31,73.95) v1(8.38,72.64) v1(8.38,69.6) v1(8.31,64.11) v1(8.31,62.7) v1(8.31,61.28) v1(8.31,59.87) v1(8.31,58.45) v1(8.31,57.04) v1(8.31,55.62) v1(8.31,54.21) v1(8.31,52.79) v1(8.31,51.38) v1(8.31,49.96) v1(8.31,48.55) v1(8.38,44.2) v1(8.31,34) v1(8.31,28.83) v1(8.31,23.79) v1(8.31,22.38) v1(8.6,66.1) v1(8.64,98.04) v1(8.64,95) v1(8.64,47.24) v1(8.69,40.7) v1(8.89,21.84) v1(8.89,18.8) v1(9.06,83.64) v1(9.14,97.28) v1(9.14,95.76) v1(9.14,72.14) v1(9.14,71.37) v1(9.14,70.61) v1(9.14,69.85) v1(9.14,46.74) v1(9.14,45.97) v1(9.14,45.21) v1(9.14,44.45) v1(9.21,39.31) v1(9.14,21.08) v1(9.14,20.32) v1(9.14,19.56) v1(9.3,85.78) v1(9.59,64.71) v1(10.02,66.1) v1(10.11,40.7) v1(10.1,35.92) v1(10.1,31.22) v1(10.25,84.4) v1(10.3,37.32) v1(10.41,101.85) v1(10.45,97.21) v1(10.45,95.83) v1(10.41,91.69) v1(10.41,86.61) v1(10.41,81.53) v1(10.41,76.45) v1(10.41,71.37) v1(10.41,61.21) v1(10.41,56.13) v1(10.41,51.05) v1(10.41,45.97) v1(10.44,29.85) v1(10.41,25.65) v1(10.41,20.57) v1(10.41,15.49) v1(10.61,32.55) v1(10.62,39.31) v1(10.71,85.78) v1(10.73,34.65) v1(11.01,64.71) v1(11.43,66.1) v1(11.44,38.16) v1(11.49,30.76) v1(11.52,40.7) v1(11.67,84.4) v1(11.68,29.15) v1(11.86,97.21) v1(11.86,95.83) v1(11.92,33.08) v1(12.04,39.31) v1(12.08,34.23) v1(12.13,85.78) v1(12.17,35.62) v1(12.42,64.71) v1(12.56,31.69) v1(12.64,72.49) v1(12.64,71.07) v1(12.64,69.66) v1(12.64,68.24) v1(12.64,66.83) v1(12.85,38.16) v1(12.89,30.54) v1(12.94,40.7) v1(12.98,36.77) v1(13.08,84.4) v1(13.09,29.11) v1(13.28,97.21) v1(13.28,95.83) v1(13.26,73.76) v1(13.28,33.48) v1(13.28,27.71) v1(13.28,26.29) v1(13.28,24.88) v1(13.28,23.46) v1(13.28,22.05) v1(13.28,20.63) v1(13.28,19.22) v1(13.28,17.81) v1(13.28,16.39) v1(13.28,14.98) v1(13.28,13.56) v1(13.28,12.15) v1(13.28,10.73) v1(13.28,9.32) v1(13.28,7.9) v1(13.28,6.49) v1(13.28,5.07) v1(13.28,3.66) v1(13.54,85.78) v1(13.58,35.62) v1(13.67,65.39) v1(13.82,2.35) v1(13.94,32.01) v1(14.03,72.42) v1(14.03,71) v1(14.03,69.59) v1(14.03,68.17) v1(14.03,66.76) v1(14.19,29.97) v1(14.22,61.21) v1(14.22,56.13) v1(14.22,45.97) v1(14.22,40.89) v1(14.22,40.1) v1(14.25,37.4) v1(14.22,30.7) v1(14.5,84.4) v1(14.55,74.35) v1(14.6,34.64) v1(14.69,97.21) v1(14.65,95.49) v1(14.66,38.76) v1(14.66,33.22) v1(14.66,28.64) v1(14.66,27.23) v1(14.66,25.81) v1(14.66,24.4) v1(14.66,22.98) v1(14.66,21.57) v1(14.66,20.15) v1(14.66,18.74) v1(14.66,17.32) v1(14.66,15.91) v1(14.66,14.49) v1(14.66,13.08) v1(14.66,11.66) v1(14.66,10.25) v1(14.66,8.83) v1(14.66,7.42) v1(14.66,6) v1(14.66,4.59) v1(14.96,85.78) v1(15.06,3.23) v1(15.14,1.85) v1(15.33,72.97) v1(15.49,112.01) v1(15.49,106.93) v1(15.49,101.85) v1(15.49,91.69) v1(15.49,86.61) v1(15.49,81.53) v1(15.49,76.45) v1(15.49,15.49) v1(15.49,10.41) v1(15.49,5.33) v1(15.65,94.49) v1(15.79,96.32) v1(15.82,71.64) v1(15.82,70.23) v1(15.82,68.81) v1(15.82,67.4) v1(15.82,65.98) v1(15.82,64.57) v1(15.82,63.15) v1(15.82,61.74) v1(15.82,60.32) v1(15.82,58.91) v1(15.82,57.49) v1(15.82,56.08) v1(15.82,54.66) v1(15.82,53.25) v1(15.82,51.83) v1(15.82,50.42) v1(15.82,49) v1(15.82,47.59) v1(15.82,46.17) v1(15.82,44.76) v1(15.82,43.35) v1(15.82,41.93) v1(15.82,40.52) v1(15.82,39.1) v1(15.82,37.69) v1(15.82,36.27) v1(15.82,34.86) v1(15.82,33.44) v1(15.82,32.03) v1(15.82,30.61) v1(15.82,29.2) v1(15.82,27.78) v1(15.82,26.37) v1(15.82,24.95) v1(15.82,23.54) v1(15.82,22.12) v1(15.82,20.71) v1(15.82,19.29) v1(15.82,17.88) v1(15.91,84.4) v1(15.96,74.35) v1(16.37,85.78) v1(16.45,9.12) v1(16.45,7.71) v1(16.45,6.29) v1(16.45,4.88) v1(16.45,3.46) v1(16.61,16.7) v1(16.56,1.85) v1(16.65,93.49) v1(16.79,95.32) v1(16.98,73.37) v1(17.2,71.97) v1(17.2,70.56) v1(17.2,69.14) v1(17.2,67.73) v1(17.2,66.31) v1(17.2,64.9) v1(17.2,63.48) v1(17.2,62.07) v1(17.2,60.66) v1(17.2,59.24) v1(17.2,57.83) v1(17.2,56.41) v1(17.2,55) v1(17.2,53.58) v1(17.2,52.17) v1(17.2,50.75) v1(17.2,49.34) v1(17.2,47.92) v1(17.2,46.51) v1(17.2,45.09) v1(17.2,43.68) v1(17.2,42.26) v1(17.2,40.85) v1(17.2,39.43) v1(17.2,38.02) v1(17.2,36.6) v1(17.2,35.19) v1(17.2,33.77) v1(17.2,32.36) v1(17.2,30.94) v1(17.2,29.53) v1(17.2,28.12) v1(17.2,26.7) v1(17.2,25.29) v1(17.2,23.87) v1(17.2,22.46) v1(17.2,21.04) v1(17.2,19.63) v1(17.2,18.21) v1(17.26,83.99) v1(17.43,10.15) v1(17.61,15.7) v1(17.66,92.49) v1(17.67,2.72) v1(17.79,94.32) v1(17.75,85.47) v1(17.84,8.37) v1(17.84,6.95) v1(17.84,5.54) v1(17.84,4.12) v1(18.13,17.14) v1(18.27,82.99) v1(18.36,81.58) v1(18.36,80.16) v1(18.36,78.75) v1(18.36,77.34) v1(18.36,75.92) v1(18.36,74.51) v1(18.36,73.09) v1(18.36,71.68) v1(18.36,70.26) v1(18.36,68.85) v1(18.36,67.43) v1(18.36,66.02) v1(18.36,64.6) v1(18.36,63.19) v1(18.36,61.77) v1(18.36,60.36) v1(18.36,58.94) v1(18.36,57.53) v1(18.36,56.11) v1(18.36,54.7) v1(18.36,53.28) v1(18.36,51.87) v1(18.36,50.45) v1(18.36,49.04) v1(18.36,47.62) v1(18.36,46.21) v1(18.36,44.8) v1(18.36,43.38) v1(18.36,41.97) v1(18.36,40.55) v1(18.36,39.14) v1(18.36,37.72) v1(18.36,36.31) v1(18.36,34.89) v1(18.36,33.48) v1(18.36,32.06) v1(18.36,30.65) v1(18.36,29.23) v1(18.36,27.82) v1(18.36,26.4) v1(18.36,24.99) v1(18.36,23.57) v1(18.36,22.16) v1(18.36,20.74) v1(18.36,19.33) v1(18.56,17.93) v1(18.61,14.7) v1(18.66,91.49) v1(18.66,10.85) v1(18.79,93.31) v1(18.75,84.47) v1(18.73,9.47) v1(19.13,16.14) v1(19.3,86.61) v1(19.56,16.93) v1(19.61,13.7) v1(19.65,90.49) v1(19.79,92.31) v1(19.74,83.46) v1(19.74,82.04) v1(19.74,80.63) v1(19.74,79.21) v1(19.74,77.8) v1(19.74,76.38) v1(19.74,74.97) v1(19.74,73.55) v1(19.74,72.14) v1(19.74,70.72) v1(19.74,69.31) v1(19.74,67.89) v1(19.74,66.48) v1(19.74,65.06) v1(19.74,63.65) v1(19.74,62.24) v1(19.74,60.82) v1(19.74,59.41) v1(19.74,57.99) v1(19.74,56.58) v1(19.74,55.16) v1(19.74,53.75) v1(19.74,52.33) v1(19.74,50.92) v1(19.74,49.5) v1(19.74,48.09) v1(19.74,46.67) v1(19.74,45.26) v1(19.74,43.84) v1(19.74,42.43) v1(19.74,41.01) v1(19.74,39.6) v1(19.74,38.18) v1(19.74,36.77) v1(19.74,35.35) v1(19.74,33.94) v1(19.74,32.52) v1(19.74,31.11) v1(19.74,29.7) v1(19.74,28.28) v1(19.74,26.87) v1(19.74,25.45) v1(19.74,24.04) v1(19.74,22.62) v1(19.74,21.21) v1(19.74,19.79) v1(20.04,18.41) v1(20.07,10.85) v1(20.13,15.14) v1(20.14,9.47) v1(20.26,94.23) v1(20.37,95.64) v1(20.57,112.01) v1(20.57,106.93) v1(20.57,101.85) v1(20.57,96.77) v1(20.56,15.93) v1(20.61,12.7) v1(20.57,5.33) v1(20.66,89.49) v1(20.79,91.31) v1(20.9,88.1) v1(20.9,86.68) v1(20.9,85.27) v1(20.9,83.85) v1(20.9,82.44) v1(20.9,81.02) v1(20.9,79.61) v1(20.9,78.19) v1(20.9,76.78) v1(20.9,75.36) v1(20.9,73.95) v1(20.9,72.53) v1(20.9,71.12) v1(20.9,69.71) v1(20.9,68.29) v1(20.9,66.88) v1(20.9,65.46) v1(20.9,64.05) v1(20.9,62.63) v1(20.9,61.22) v1(20.9,59.8) v1(20.9,58.39) v1(20.9,56.97) v1(20.9,55.56) v1(20.9,54.14) v1(20.9,52.73) v1(20.9,51.31) v1(20.9,49.9) v1(20.9,48.48) v1(20.9,47.07) v1(20.9,45.65) v1(20.9,44.24) v1(20.9,42.82) v1(20.9,41.41) v1(20.9,39.99) v1(20.9,38.58) v1(20.9,37.17) v1(20.9,35.75) v1(20.9,34.34) v1(20.9,32.92) v1(20.9,31.51) v1(20.9,30.09) v1(20.9,28.68) v1(20.9,27.26) v1(20.9,25.85) v1(20.9,24.43) v1(20.9,23.02) v1(20.9,21.6) v1(20.9,20.19) v1(20.9,18.77) v1(20.96,93) v1(21.04,17.41) v1(21.13,14.14) v1(21.37,96.64) v1(21.37,8.77) v1(21.47,10.63) v1(21.56,14.93) v1(21.53,7.36) v1(21.53,5.94) v1(21.67,17.59) v1(21.61,11.7) v1(21.79,90.31) v1(21.87,94.04) v1(21.96,92) v1(22.04,16.41) v1(22.12,95.43) v1(22.13,13.14) v1(22.28,88.99) v1(22.28,87.57) v1(22.28,86.16) v1(22.28,84.74) v1(22.28,83.33) v1(22.28,81.91) v1(22.28,80.5) v1(22.28,79.08) v1(22.28,77.67) v1(22.28,76.25) v1(22.28,74.84) v1(22.28,73.42) v1(22.28,72.01) v1(22.28,70.59) v1(22.28,69.18) v1(22.28,67.76) v1(22.28,66.35) v1(22.28,64.94) v1(22.28,63.52) v1(22.28,62.11) v1(22.28,60.69) v1(22.28,59.28) v1(22.28,57.86) v1(22.28,56.45) v1(22.28,55.03) v1(22.28,53.62) v1(22.28,52.2) v1(22.28,50.79) v1(22.28,49.37) v1(22.28,47.96) v1(22.28,46.54) v1(22.28,45.13) v1(22.28,43.71) v1(22.28,42.3) v1(22.28,40.88) v1(22.28,39.47) v1(22.28,38.05) v1(22.28,36.64) v1(22.28,35.22) v1(22.28,33.81) v1(22.28,32.4) v1(22.28,30.98) v1(22.28,29.57) v1(22.28,28.15) v1(22.28,26.74) v1(22.28,25.32) v1(22.28,23.91) v1(22.28,22.49) v1(22.28,21.08) v1(22.28,19.66) v1(22.24,4.72) v1(22.37,97.64) v1(22.47,9.63) v1(22.56,13.93) v1(22.61,10.7) v1(22.67,16.59) v1(22.88,93.04) v1(22.85,18.37) v1(22.96,91) v1(22.92,8.29) v1(22.92,6.87) v1(23.04,15.41) v1(23.12,96.43) v1(23.13,12.14) v1(23.38,5.53) v1(23.35,3.84) v1(23.51,98.48) v1(23.44,89.66) v1(23.44,88.25) v1(23.44,86.83) v1(23.44,85.42) v1(23.44,84.01) v1(23.44,82.59) v1(23.44,81.18) v1(23.44,79.76) v1(23.44,78.35) v1(23.44,76.93) v1(23.44,75.52) v1(23.44,74.1) v1(23.44,72.69) v1(23.44,71.27) v1(23.44,69.86) v1(23.44,68.44) v1(23.44,67.03) v1(23.44,65.61) v1(23.44,64.2) v1(23.44,62.78) v1(23.44,61.37) v1(23.44,59.95) v1(23.44,58.54) v1(23.44,57.12) v1(23.44,55.71) v1(23.44,54.3) v1(23.44,52.88) v1(23.44,51.47) v1(23.44,50.05) v1(23.44,48.64) v1(23.44,47.22) v1(23.44,45.81) v1(23.44,44.39) v1(23.44,42.98) v1(23.44,41.56) v1(23.44,40.15) v1(23.44,38.73) v1(23.44,37.32) v1(23.44,35.9) v1(23.44,34.49) v1(23.44,33.07) v1(23.44,31.66) v1(23.44,30.24) v1(23.44,28.83) v1(23.44,27.41) v1(23.44,26) v1(23.44,24.58) v1(23.44,23.17) v1(23.44,21.76) v1(23.44,20.34) v1(23.44,18.93) v1(23.56,12.93) v1(23.67,15.59) v1(23.88,92.04) v1(23.85,17.37) v1(23.89,10.1) v1(24.04,14.41) v1(24.13,8.13) v1(24.37,97.1) v1(24.35,17.85) v1(24.67,14.58) v1(24.82,90.99) v1(24.82,89.57) v1(24.82,88.16) v1(24.82,86.74) v1(24.82,85.33) v1(24.82,83.91) v1(24.82,82.5) v1(24.82,81.08) v1(24.82,79.67) v1(24.82,78.25) v1(24.82,76.84) v1(24.82,75.42) v1(24.82,74.01) v1(24.82,72.59) v1(24.82,71.18) v1(24.82,69.76) v1(24.82,68.35) v1(24.82,66.93) v1(24.82,65.52) v1(24.82,64.1) v1(24.82,62.69) v1(24.82,61.27) v1(24.82,59.86) v1(24.82,58.45) v1(24.82,57.03) v1(24.82,55.62) v1(24.82,54.2) v1(24.82,52.79) v1(24.82,51.37) v1(24.82,49.96) v1(24.82,48.54) v1(24.82,47.13) v1(24.82,45.71) v1(24.82,44.3) v1(24.82,42.88) v1(24.82,41.47) v1(24.82,40.05) v1(24.82,38.64) v1(24.82,37.22) v1(24.82,35.81) v1(24.82,34.39) v1(24.82,32.98) v1(24.82,31.56) v1(24.82,30.15) v1(24.82,28.74) v1(24.82,27.32) v1(24.82,25.91) v1(24.82,24.49) v1(24.82,23.08) v1(24.82,21.66) v1(24.82,20.25) v1(24.85,16.37) v1(24.89,3.3) v1(24.92,98.48) v1(25.04,13.41) v1(25.26,18.9) v1(25.35,16.85) v1(25.65,112.01) v1(25.65,106.93) v1(25.65,101.85) v1(25.65,91.69) v1(25.65,86.61) v1(25.65,76.45) v1(25.67,13.59) v1(25.78,97.1) v1(25.85,15.36) v1(25.91,3.05) v1(25.98,85.67) v1(25.98,84.25) v1(25.98,82.84) v1(25.98,81.42) v1(25.98,80.01) v1(25.98,78.6) v1(25.98,77.18) v1(25.98,75.77) v1(25.98,74.35) v1(25.98,72.94) v1(25.98,71.52) v1(25.98,70.11) v1(25.98,68.69) v1(25.98,67.28) v1(25.98,65.86) v1(25.98,64.45) v1(25.98,63.03) v1(25.98,61.62) v1(25.98,60.2) v1(25.98,58.79) v1(25.98,57.37) v1(25.98,55.96) v1(25.98,54.54) v1(25.98,53.13) v1(25.98,51.71) v1(25.98,50.3) v1(25.98,48.88) v1(25.98,47.47) v1(25.98,46.06) v1(25.98,44.64) v1(25.98,43.23) v1(25.98,41.81) v1(25.98,40.4) v1(25.98,38.98) v1(25.98,37.57) v1(25.98,36.15) v1(25.98,34.74) v1(25.98,33.32) v1(25.98,31.91) v1(25.98,30.49) v1(25.98,29.08) v1(25.98,27.66) v1(25.98,26.25) v1(25.98,24.83) v1(25.98,23.42) v1(25.98,22) v1(25.98,20.59) v1(25.98,19.17) v1(26.04,12.41) v1(26.26,17.9) v1(26.33,98.48) v1(26.36,15.85) v1(26.67,12.59) v1(26.67,8.38) v1(26.67,3.05) v1(26.79,86.83) v1(26.85,14.36) v1(26.95,17.97) v1(26.91,10.51) v1(27.04,96.45) v1(27.26,16.9) v1(27.39,85.47) v1(27.36,84.05) v1(27.36,82.64) v1(27.36,81.22) v1(27.36,79.81) v1(27.36,78.39) v1(27.36,76.98) v1(27.36,75.56) v1(27.36,74.15) v1(27.36,72.74) v1(27.36,71.32) v1(27.36,69.91) v1(27.36,68.49) v1(27.36,67.08) v1(27.36,65.66) v1(27.36,64.25) v1(27.36,62.83) v1(27.36,61.42) v1(27.36,60) v1(27.36,58.59) v1(27.36,57.17) v1(27.36,55.76) v1(27.36,54.34) v1(27.36,52.93) v1(27.36,51.51) v1(27.36,50.1) v1(27.36,48.68) v1(27.36,47.27) v1(27.36,45.85) v1(27.36,44.44) v1(27.36,43.03) v1(27.36,41.61) v1(27.36,40.2) v1(27.36,38.78) v1(27.36,37.37) v1(27.36,35.95) v1(27.36,34.54) v1(27.36,33.12) v1(27.36,31.71) v1(27.36,30.29) v1(27.36,28.88) v1(27.36,27.46) v1(27.36,26.05) v1(27.36,24.63) v1(27.36,23.22) v1(27.36,21.8) v1(27.36,20.39) v1(27.36,14.85) v1(27.36,11.89) v1(27.43,8.38) v1(27.43,3.05) v1(27.6,97.84) v1(27.69,19.01) v1(27.9,16.93) v1(27.85,13.36) v1(27.91,87.69) v1(28.16,9.83) v1(28.19,3.05) v1(28.31,95.83) v1(28.26,15.9) v1(28.36,13.85) v1(28.53,86.3) v1(28.52,38.03) v1(28.52,36.62) v1(28.52,35.2) v1(28.52,33.79) v1(28.69,18.01) v1(28.86,97.21) v1(28.89,39.4) v1(28.84,32.41) v1(28.85,12.36) v1(28.96,3.05) v1(29.15,28.97) v1(29.24,27.56) v1(29.26,14.9) v1(29.33,87.69) v1(29.36,12.85) v1(29.46,40.89) v1(29.46,30.73) v1(29.46,25.65) v1(29.72,95.83) v1(29.72,3.05) v1(29.89,40.4) v1(29.9,37.41) v1(29.9,35.99) v1(29.9,34.58) v1(29.86,30.2) v1(29.95,86.3) v1(30.06,31.69) v1(30.28,97.21) v1(30.24,38.78) v1(30.24,26.56) v1(30.26,13.9) v1(30.48,3.05) v1(30.69,16.01) v1(30.73,112.01) v1(30.73,106.93) v1(30.73,101.85) v1(30.73,91.69) v1(30.74,87.69) v1(30.73,81.53) v1(30.73,76.45) v1(30.73,71.37) v1(30.73,66.29) v1(30.73,61.21) v1(30.73,56.13) v1(30.73,51.05) v1(30.73,45.97) v1(30.73,35.81) v1(30.73,20.57) v1(30.99,27.78) v1(31.06,35.18) v1(31.06,33.76) v1(31.14,95.83) v1(31.16,36.59) v1(31.28,40.7) v1(31.23,30.54) v1(31.24,25.56) v1(31.24,3.05) v1(31.36,86.3) v1(31.32,29.15) v1(31.5,97.28) v1(31.5,72.14) v1(31.5,71.37) v1(31.5,70.61) v1(31.5,69.85) v1(31.5,46.74) v1(31.5,45.97) v1(31.5,45.21) v1(31.5,44.45) v1(31.47,31.76) v1(31.5,21.34) v1(31.5,20.57) v1(31.5,19.81) v1(31.5,19.05) v1(31.55,39.31) v1(31.69,15.01) v1(32,98.04) v1(32,95) v1(31.99,26.78) v1(32,3.05) v1(32.15,87.57) v1(32.26,72.64) v1(32.26,69.6) v1(32.26,47.24) v1(32.26,44.2) v1(32.22,37.52) v1(32.25,24.56) v1(32.26,21.84) v1(32.26,18.8) v1(32.33,85.27) v1(32.33,83.85) v1(32.33,82.44) v1(32.33,81.02) v1(32.33,79.61) v1(32.33,78.19) v1(32.33,76.78) v1(32.33,75.36) v1(32.33,73.95) v1(32.33,51.38) v1(32.33,49.96) v1(32.33,48.55) v1(32.33,23.15) v1(32.44,13.81) v1(32.44,12.4) v1(32.69,40.7) v1(32.65,30.54) v1(32.77,98.04) v1(32.77,95) v1(32.74,29.15) v1(32.77,3.05) v1(32.87,12.9) v1(32.96,39.31) v1(32.91,35.38) v1(32.96,34.1) v1(33,32.69) v1(32.98,25.78) v1(33.02,69.6) v1(33.02,44.2) v1(33.02,18.8) v1(33.15,86.57) v1(33.14,52.53) v1(33.53,98.04) v1(33.53,95) v1(33.61,37.22) v1(33.6,28.03) v1(33.53,3.05) v1(33.71,85.27) v1(33.71,83.85) v1(33.71,82.44) v1(33.71,81.02) v1(33.71,79.61) v1(33.71,78.19) v1(33.71,76.78) v1(33.71,75.36) v1(33.71,73.95) v1(33.78,72.64) v1(33.78,69.6) v1(33.71,49.96) v1(33.71,48.55) v1(33.78,47.24) v1(33.78,44.2) v1(33.71,24.56) v1(33.71,23.15) v1(33.78,21.84) v1(33.78,18.8) v1(33.93,51.36) v1(34.01,31.69) v1(33.95,26.66) v1(34.11,40.7) v1(34.06,30.42) v1(34.14,53.54) v1(34.2,13.39) v1(34.29,98.04) v1(34.29,95) v1(34.29,3.05) v1(34.38,39.31) v1(34.54,97.28) v1(34.54,96.52) v1(34.54,95.76) v1(34.54,72.14) v1(34.54,71.37) v1(34.54,70.61) v1(34.54,69.85) v1(34.54,46.74) v1(34.54,45.97) v1(34.54,45.21) v1(34.54,44.45) v1(34.54,21.34) v1(34.54,20.57) v1(34.54,19.81) v1(34.54,19.05) v1(34.78,33.41) v1(34.87,36.1) v1(34.87,34.69) v1(34.93,52.36) v1(34.98,29.35) v1(34.98,27.94) v1(35.05,3.05) v1(35.14,54.54) v1(35.19,25.98) v1(35.41,31.89) v1(35.52,40.7) v1(35.58,13.7) v1(35.66,37.27) v1(35.79,39.31) v1(35.81,112.01) v1(35.81,106.93) v1(35.81,101.85) v1(35.81,96.77) v1(35.81,91.69) v1(35.81,86.61) v1(35.81,81.53) v1(35.81,76.45) v1(35.81,71.37) v1(35.81,66.29) v1(35.81,61.21) v1(35.81,56.13) v1(35.81,51.05) v1(35.81,45.97) v1(35.81,30.73) v1(35.81,25.65) v1(35.81,20.57) v1(35.81,15.49) v1(35.81,3.05) v1(35.93,53.36) v1(36.14,55.54) v1(36.28,27.36) v1(36.61,25.98) v1(36.58,14.7) v1(36.58,3.05) v1(36.7,41.49) v1(36.77,35.76) v1(36.77,34.35) v1(36.77,32.93) v1(36.77,31.52) v1(36.77,30.1) v1(36.77,28.69) v1(36.71,12.88) v1(36.93,54.36) v1(37.07,39.91) v1(37.05,37.52) v1(37.1,10.32) v1(37.14,56.54) v1(37.35,12.53) v1(37.34,8.38) v1(37.34,3.05) v1(37.58,15.7) v1(37.7,42.49) v1(37.83,26.69) v1(37.82,13.98) v1(37.93,55.36) v1(38.04,73.19) v1(38.04,71.78) v1(38.04,70.36) v1(38.04,68.95) v1(38.04,67.53) v1(38.04,66.12) v1(38.04,64.7) v1(38.04,63.29) v1(38.04,61.87) v1(38.04,60.46) v1(38.04,59.04) v1(38.04,57.63) v1(38.07,40.91) v1(38.08,36.55) v1(38.1,8.38) v1(38.1,3.05) v1(38.16,35.14) v1(38.16,33.73) v1(38.16,32.31) v1(38.16,30.9) v1(38.16,29.48) v1(38.16,28.07) v1(38.2,11.43) v1(38.45,13.63) v1(38.58,16.7) v1(38.86,8.38) v1(38.86,3.05) v1(38.98,74.25) v1(38.93,56.37) v1(39.11,42.51) v1(39.2,12.43) v1(39.31,40.22) v1(39.31,38.81) v1(39.31,37.39) v1(39.31,35.98) v1(39.31,34.56) v1(39.31,33.15) v1(39.31,31.73) v1(39.31,30.32) v1(39.31,28.9) v1(39.31,27.49) v1(39.31,26.07) v1(39.31,24.66) v1(39.31,23.24) v1(39.31,21.83) v1(39.31,20.41) v1(39.31,19) v1(39.31,17.44) v1(39.31,14.75) v1(39.43,71.84) v1(39.43,70.42) v1(39.43,69.01) v1(39.43,67.59) v1(39.43,66.18) v1(39.43,64.76) v1(39.43,63.35) v1(39.43,61.93) v1(39.43,60.52) v1(39.43,59.1) v1(39.43,57.69) v1(39.62,8.38) v1(39.62,3.05) v1(39.87,73.18) v1(40.19,74.99) v1(40.11,41.51) v1(40.2,13.43) v1(40.39,8.38) v1(40.39,3.05) v1(40.7,40.22) v1(40.7,38.81) v1(40.7,37.39) v1(40.7,35.98) v1(40.7,34.56) v1(40.7,33.15) v1(40.7,31.73) v1(40.7,30.32) v1(40.7,28.9) v1(40.7,27.49) v1(40.7,26.07) v1(40.7,24.66) v1(40.7,23.24) v1(40.7,21.83) v1(40.7,20.41) v1(40.7,18.85) v1(40.7,16.17) v1(40.7,14.75) v1(40.72,16.88) v1(40.89,112.01) v1(40.89,106.93) v1(40.89,101.85) v1(40.89,96.77) v1(40.89,91.69) v1(40.89,86.61) v1(40.89,81.53) v1(40.89,76.45) v1(40.89,71.37) v1(40.89,66.29) v1(40.89,61.21) v1(40.89,56.13) v1(40.89,51.05) v1(40.89,45.97) v1(40.89,40.89) v1(40.89,10.41) v1(40.89,7.62) v1(40.89,6.86) v1(40.89,6.1) v1(40.89,5.33) v1(40.89,4.57) v1(40.89,3.81) v1(41.28,73.31) v1(41.61,74.95) v1(41.58,19.7) v1(41.85,72.02) v1(41.85,70.61) v1(41.85,69.19) v1(41.85,67.78) v1(41.85,66.36) v1(41.85,64.95) v1(41.85,63.53) v1(41.85,62.12) v1(41.85,60.7) v1(41.85,59.29) v1(41.85,57.87) v1(41.85,56.46) v1(41.85,55.04) v1(41.85,53.63) v1(41.85,52.21) v1(41.85,50.8) v1(41.85,49.39) v1(41.85,47.97) v1(41.85,46.56) v1(41.85,45.14) v1(41.85,43.73) v1(41.85,42.31) v1(41.85,40.9) v1(41.85,39.48) v1(41.85,38.07) v1(41.85,36.65) v1(41.85,35.24) v1(41.85,33.82) v1(41.85,32.41) v1(41.85,30.99) v1(41.85,29.58) v1(41.85,28.16) v1(41.85,26.75) v1(41.85,25.33) v1(41.85,23.92) v1(41.85,22.5) v1(41.85,21.09) v1(41.82,17.98) v1(42.6,73.94) v1(42.82,18.98) v1(43.24,72.68) v1(43.24,71.26) v1(43.24,69.85) v1(43.24,68.44) v1(43.24,67.02) v1(43.24,65.61) v1(43.24,64.19) v1(43.24,62.78) v1(43.24,61.36) v1(43.24,59.95) v1(43.24,58.53) v1(43.24,57.12) v1(43.24,55.7) v1(43.24,54.29) v1(43.24,52.87) v1(43.24,51.46) v1(43.24,50.04) v1(43.24,48.63) v1(43.24,47.21) v1(43.24,45.8) v1(43.24,44.38) v1(43.24,42.97) v1(43.24,41.55) v1(43.24,40.14) v1(43.24,38.72) v1(43.24,37.31) v1(43.24,35.9) v1(43.24,34.48) v1(43.24,33.07) v1(43.24,31.65) v1(43.24,30.24) v1(43.24,28.82) v1(43.24,27.41) v1(43.24,25.99) v1(43.24,24.58) v1(43.24,23.16) v1(43.24,21.75) v1(43.24,20.33) v1(44.39,73.55) v1(44.39,72.14) v1(44.39,70.72) v1(44.39,69.31) v1(44.39,67.89) v1(44.39,66.48) v1(44.39,65.06) v1(44.39,63.65) v1(44.39,62.24) v1(44.39,60.82) v1(44.39,59.41) v1(44.39,57.99) v1(44.39,56.58) v1(44.39,55.16) v1(44.39,53.75) v1(44.39,52.33) v1(44.39,50.92) v1(44.39,49.5) v1(44.39,48.09) v1(44.39,46.67) v1(44.39,45.26) v1(44.39,43.84) v1(44.39,42.43) v1(44.39,41.01) v1(44.39,39.6) v1(44.39,38.18) v1(44.39,36.77) v1(44.39,35.35) v1(44.39,33.94) v1(44.39,32.52) v1(44.39,31.11) v1(44.39,29.7) v1(44.39,28.28) v1(44.39,26.87) v1(44.39,25.45) v1(44.39,24.04) v1(44.39,22.62) v1(44.39,21.21) v1(44.39,19.79) v1(44.39,18.38) v1(44.39,16.96) v1(44.39,15.55) v1(44.39,14.13) v1(44.84,12.19) v1(45.18,74.73) v1(45.78,72.59) v1(45.78,71.18) v1(45.78,69.76) v1(45.78,68.35) v1(45.78,66.93) v1(45.78,65.52) v1(45.78,64.1) v1(45.78,62.69) v1(45.78,61.27) v1(45.78,59.86) v1(45.78,58.45) v1(45.78,57.03) v1(45.78,55.62) v1(45.78,54.2) v1(45.78,52.79) v1(45.78,51.37) v1(45.78,49.96) v1(45.78,48.54) v1(45.78,47.13) v1(45.78,45.71) v1(45.78,44.3) v1(45.78,42.88) v1(45.78,41.47) v1(45.78,40.05) v1(45.78,38.64) v1(45.78,37.22) v1(45.78,35.81) v1(45.78,34.39) v1(45.78,32.98) v1(45.78,31.56) v1(45.78,30.15) v1(45.78,28.74) v1(45.78,27.32) v1(45.78,25.91) v1(45.78,24.49) v1(45.78,23.08) v1(45.78,21.66) v1(45.78,20.25) v1(45.78,18.83) v1(45.78,14.59) v1(45.84,11.19) v1(45.97,112.01) v1(45.97,106.93) v1(45.97,101.85) v1(45.97,96.77) v1(45.97,91.69) v1(45.97,86.61) v1(45.97,81.53) v1(45.97,76.45) v1(45.97,61.21) v1(45.97,5.33) v1(46.37,16.18) v1(46.57,74.99) v1(46.58,18.35) v1(46.77,73.6) v1(46.73,13.54) v1(46.84,10.19) v1(46.93,35.29) v1(46.93,33.87) v1(46.93,32.46) v1(46.93,31.04) v1(46.93,29.63) v1(46.93,28.21) v1(46.93,26.8) v1(46.93,25.38) v1(46.93,23.97) v1(46.93,22.55) v1(46.93,21.14) v1(46.93,19.72) v1(46.99,9.14) v1(47.14,36.69) v1(47.24,8.13) v1(47.37,17.18) v1(47.5,7.11) v1(47.5,6.1) v1(47.5,5.08) v1(47.73,12.54) v1(47.98,74.99) v1(48.01,4.32) v1(48.18,73.6) v1(48.28,37.52) v1(48.26,3.56) v1(48.32,35.21) v1(48.32,33.8) v1(48.32,32.38) v1(48.32,30.97) v1(48.32,29.55) v1(48.32,28.14) v1(48.32,26.72) v1(48.32,25.31) v1(48.32,23.89) v1(48.32,22.48) v1(48.32,21.06) v1(48.32,19.65) v1(48.32,18.23) v1(48.77,3.05) v1(49.4,74.99) v1(49.39,36.14) v1(49.47,73.03) v1(49.47,71.61) v1(49.47,70.2) v1(49.47,68.78) v1(49.47,67.37) v1(49.47,65.95) v1(49.47,64.54) v1(49.47,63.12) v1(49.47,61.71) v1(49.47,33.57) v1(49.47,32.16) v1(49.47,30.74) v1(49.47,29.33) v1(49.47,27.91) v1(49.47,26.5) v1(49.53,3.05) v1(49.7,37.52) v1(49.78,81.53) v1(49.81,60.33) v1(49.84,34.94) v1(50.29,3.05) v1(50.41,25.44) v1(50.59,74.22) v1(50.78,38.43) v1(50.77,36.45) v1(50.8,7.87) v1(50.86,72.83) v1(50.86,71.41) v1(50.86,70) v1(50.86,68.59) v1(50.86,67.17) v1(50.86,65.76) v1(50.86,64.34) v1(50.86,62.93) v1(50.86,61.51) v1(50.82,59.33) v1(50.86,33.11) v1(50.86,31.7) v1(50.86,30.28) v1(50.86,28.87) v1(50.86,27.45) v1(51.05,112.01) v1(51.05,106.93) v1(51.05,101.85) v1(51.05,91.69) v1(51.05,86.61) v1(51.05,76.45) v1(51.05,71.37) v1(51.05,56.13) v1(51.05,51.05) v1(51.05,45.97) v1(51.05,40.89) v1(51.08,35.62) v1(51.05,20.57) v1(51.05,15.49) v1(51.05,10.41) v1(51.05,5.33) v1(51.05,3.05) v1(51.38,82.04) v1(51.38,80.63) v1(51.38,79.21) v1(51.72,60.39) v1(51.78,39.43) v1(51.77,37.45) v1(51.82,25.34) v1(51.82,3.05) v1(52.01,33.93) v1(52.01,32.52) v1(52.07,26.73) v1(52.19,59) v1(52.3,83.12) v1(52.31,78.15) v1(52.34,31.14) v1(52.49,35.49) v1(52.58,3.05) v1(52.65,28.02) v1(52.76,80.35) v1(52.78,40.43) v1(52.77,38.45) v1(52.89,81.75) v1(53.05,12.76) v1(53.13,60.38) v1(53.3,84.12) v1(53.22,25.57) v1(53.36,79.07) v1(53.31,77.15) v1(53.4,34.4) v1(53.4,32.99) v1(53.34,3.05) v1(53.59,96.77) v1(53.6,59) v1(53.56,30.42) v1(53.54,29.12) v1(53.89,82.76) v1(53.89,39.31) v1(54.03,26.73) v1(54.05,13.76) v1(54.1,3.05) v1(54.17,40.7) v1(54.36,97.79) v1(54.36,97.03) v1(54.36,96.27) v1(54.36,95.5) v1(54.38,85.03) v1(54.36,78.06) v1(54.31,76.15) v1(54.36,72.14) v1(54.36,71.37) v1(54.36,70.61) v1(54.36,69.85) v1(54.36,46.74) v1(54.36,45.97) v1(54.36,45.21) v1(54.36,44.45) v1(54.36,21.34) v1(54.36,20.57) v1(54.36,19.81) v1(54.36,19.05) v1(54.55,60.38) v1(54.55,33.58) v1(54.55,32.17) v1(54.61,91.95) v1(54.61,90.81) v1(54.61,89.53) v1(54.9,58.42) v1(54.85,27.88) v1(54.86,15.49) v1(54.86,3.05) v1(54.99,83.65) v1(54.92,34.95) v1(54.97,30.5) v1(54.95,29.27) v1(55.05,14.76) v1(55.12,98.04) v1(55.12,95) v1(55.19,93.69) v1(55.19,75.04) v1(55.19,73.48) v1(55.12,72.64) v1(55.12,69.6) v1(55.19,57.04) v1(55.19,55.62) v1(55.19,54.21) v1(55.19,52.79) v1(55.19,51.38) v1(55.19,49.96) v1(55.19,48.55) v1(55.12,47.24) v1(55.12,44.2) v1(55.19,22.83) v1(55.12,21.84) v1(55.12,18.8) v1(55.25,92.71) v1(55.31,39.31) v1(55.34,88.46) v1(55.36,77.06) v1(55.59,40.7) v1(55.7,59.57) v1(55.7,24.3) v1(55.63,3.05) v1(55.8,85.03) v1(55.88,98.04) v1(55.88,90.81) v1(55.88,69.6) v1(55.88,44.2) v1(55.88,18.8) v1(55.94,32.94) v1(55.94,31.53) v1(56.13,112.01) v1(56.13,106.93) v1(56.13,101.85) v1(56.18,89.58) v1(56.13,81.53) v1(56.13,66.29) v1(56.13,61.21) v1(56.17,35.62) v1(56.13,30.73) v1(56.27,27.88) v1(56.39,91.69) v1(56.34,87.45) v1(56.41,83.65) v1(56.36,76.06) v1(56.36,29.27) v1(56.36,15.3) v1(56.39,3.05) v1(56.57,93.69) v1(56.52,92.71) v1(56.57,74.67) v1(56.57,73.11) v1(56.57,58.45) v1(56.57,57.04) v1(56.57,55.62) v1(56.57,54.21) v1(56.57,52.79) v1(56.57,51.38) v1(56.57,49.96) v1(56.57,48.55) v1(56.52,34.23) v1(56.57,22.58) v1(56.64,98.04) v1(56.64,95) v1(56.64,69.6) v1(56.64,47.24) v1(56.64,44.2) v1(56.7,25.29) v1(56.64,21.84) v1(56.64,18.8) v1(56.72,39.31) v1(57,40.7) v1(57.09,32.94) v1(57.09,31.52) v1(57.18,88.58) v1(57.15,3.05) v1(57.21,85.03) v1(57.4,97.79) v1(57.4,97.03) v1(57.4,96.27) v1(57.4,95.5) v1(57.35,86.45) v1(57.4,72.14) v1(57.4,71.37) v1(57.4,70.61) v1(57.4,69.85) v1(57.4,46.74) v1(57.4,45.97) v1(57.4,45.21) v1(57.4,44.45) v1(57.4,21.34) v1(57.4,20.57) v1(57.4,19.81) v1(57.4,19.05) v1(57.58,35.47) v1(57.67,27.71) v1(57.7,26.29) v1(57.81,83.45) v1(57.77,29.27) v1(57.78,15.3) v1(57.91,3.05) v1(58.06,30.5) v1(58.18,87.58) v1(58.14,39.31) v1(58.2,24.84) v1(58.42,85.6) v1(58.42,40.7) v1(58.48,34.38) v1(58.48,32.96) v1(58.57,84.65) v1(58.67,96.77) v1(58.67,3.05) v1(58.81,82.45) v1(58.91,28.43) v1(59.19,15.3) v1(59.29,31.81) v1(59.3,25.94) v1(59.44,87.12) v1(59.47,30.42) v1(59.48,11.11) v1(59.44,3.05) v1(59.57,83.64) v1(59.55,39.31) v1(59.79,85.28) v1(59.81,81.45) v1(59.75,27.28) v1(59.83,40.7) v1(59.94,35.81) v1(59.95,9.47) v1(60.2,8.38) v1(60.2,3.05) v1(60.29,16.19) v1(60.57,82.65) v1(60.62,86.4) v1(60.71,31.84) v1(60.79,84.28) v1(60.81,80.45) v1(60.78,10.85) v1(60.9,38.9) v1(60.9,37.49) v1(60.9,36.07) v1(60.9,34.66) v1(60.9,33.24) v1(60.89,30.42) v1(60.85,11.49) v1(60.96,8.38) v1(60.96,3.05) v1(61.09,15.03) v1(61.21,112.01) v1(61.21,106.93) v1(61.21,101.85) v1(61.21,96.77) v1(61.21,91.69) v1(61.21,76.45) v1(61.21,71.37) v1(61.21,66.29) v1(61.21,61.21) v1(61.21,56.13) v1(61.21,51.05) v1(61.21,45.97) v1(61.25,40.7) v1(61.21,25.65) v1(61.21,20.57) v1(61.29,17.19) v1(61.21,5.33) v1(61.47,86.61) v1(61.57,81.65) v1(61.63,85.4) v1(61.79,83.28) v1(61.81,79.45) v1(61.72,8.38) v1(61.72,3.05) v1(61.85,9.47) v1(62.05,31.23) v1(62.1,16.04) v1(62.2,10.85) v1(62.25,39.7) v1(62.29,38.28) v1(62.29,36.87) v1(62.29,35.45) v1(62.29,34.04) v1(62.29,32.62) v1(62.29,18.19) v1(62.26,11.49) v1(62.48,8.38) v1(62.48,3.05) v1(62.57,80.64) v1(62.57,14.6) v1(62.63,84.4) v1(62.79,82.28) v1(62.81,78.45) v1(63.1,17.03) v1(63.29,19.19) v1(63.27,9.47) v1(63.25,8.38) v1(63.25,3.05) v1(63.44,77.19) v1(63.44,75.77) v1(63.44,74.36) v1(63.44,72.94) v1(63.44,71.53) v1(63.44,70.11) v1(63.44,68.7) v1(63.44,67.28) v1(63.44,65.87) v1(63.44,64.46) v1(63.44,63.04) v1(63.44,61.63) v1(63.44,60.21) v1(63.44,58.8) v1(63.44,57.38) v1(63.44,55.97) v1(63.44,54.55) v1(63.44,53.14) v1(63.44,51.72) v1(63.44,50.31) v1(63.44,48.89) v1(63.44,47.48) v1(63.44,46.06) v1(63.44,44.65) v1(63.44,43.23) v1(63.44,41.82) v1(63.44,40.4) v1(63.44,38.99) v1(63.44,37.57) v1(63.44,36.16) v1(63.44,34.74) v1(63.44,33.33) v1(63.44,31.92) v1(63.44,30.5) v1(63.44,29.09) v1(63.44,27.67) v1(63.44,26.26) v1(63.44,24.84) v1(63.44,23.43) v1(63.44,22.01) v1(63.44,20.6) v1(63.57,79.64) v1(63.57,15.6) v1(63.62,83.4) v1(63.62,13.74) v1(63.68,11.49) v1(63.61,10.85) v1(63.79,81.28) v1(63.75,7.62) v1(63.75,6.86) v1(63.75,6.1) v1(63.75,5.33) v1(63.75,4.57) v1(63.75,3.81) v1(64.1,18.03) v1(64.57,78.64) v1(64.57,16.6) v1(64.63,82.4) v1(64.62,14.74) v1(64.62,12.84) v1(64.68,9.47) v1(64.79,80.28) v1(64.83,77.25) v1(64.83,75.84) v1(64.83,74.42) v1(64.83,73.01) v1(64.83,71.59) v1(64.83,70.18) v1(64.83,68.76) v1(64.83,67.35) v1(64.83,65.93) v1(64.83,64.52) v1(64.83,63.1) v1(64.83,61.69) v1(64.83,60.27) v1(64.83,58.86) v1(64.83,57.44) v1(64.83,56.03) v1(64.83,54.62) v1(64.83,53.2) v1(64.83,51.79) v1(64.83,50.37) v1(64.83,48.96) v1(64.83,47.54) v1(64.83,46.13) v1(64.83,44.71) v1(64.83,43.3) v1(64.83,41.88) v1(64.83,40.47) v1(64.83,39.05) v1(64.83,37.64) v1(64.83,36.22) v1(64.83,34.81) v1(64.83,33.39) v1(64.83,31.98) v1(64.83,30.56) v1(64.83,29.15) v1(64.83,27.73) v1(64.83,26.32) v1(64.83,24.9) v1(64.83,23.49) v1(64.83,22.08) v1(64.83,20.66) v1(64.83,19.25) v1(65.09,11.49) v1(65.03,10.85) v1(65.57,17.6) v1(65.63,81.4) v1(65.62,15.74) v1(65.62,13.84) v1(65.79,79.28) v1(65.89,19.87) v1(65.98,77.88) v1(65.98,76.46) v1(65.98,75.05) v1(65.98,73.63) v1(65.98,72.22) v1(65.98,70.8) v1(65.98,69.39) v1(65.98,67.97) v1(65.98,66.56) v1(65.98,65.14) v1(65.98,63.73) v1(65.98,62.31) v1(65.98,60.9) v1(65.98,59.48) v1(65.98,58.07) v1(65.98,56.65) v1(65.98,55.24) v1(65.98,53.83) v1(65.98,52.41) v1(65.98,51) v1(65.98,49.58) v1(65.98,48.17) v1(65.98,46.75) v1(65.98,45.34) v1(65.98,43.92) v1(65.98,42.51) v1(65.98,41.09) v1(65.98,39.68) v1(65.98,38.26) v1(65.98,36.85) v1(65.98,35.43) v1(65.98,34.02) v1(65.98,32.6) v1(65.98,31.19) v1(65.98,29.77) v1(65.98,28.36) v1(65.98,26.94) v1(65.98,25.53) v1(65.98,24.11) v1(65.98,22.7) v1(65.98,21.29) v1(66.1,9.47) v1(66.13,12.45) v1(66.29,112.01) v1(66.29,106.93) v1(66.29,101.85) v1(66.29,96.77) v1(66.29,91.69) v1(66.29,86.61) v1(66.29,5.33) v1(66.44,10.85) v1(66.57,18.6) v1(66.63,80.4) v1(66.62,16.74) v1(66.62,14.84) v1(66.62,8.15) v1(67.13,13.45) v1(67.37,79.19) v1(67.37,77.78) v1(67.37,76.37) v1(67.37,74.95) v1(67.37,73.54) v1(67.37,72.12) v1(67.37,70.71) v1(67.37,69.29) v1(67.37,67.88) v1(67.37,66.46) v1(67.37,65.05) v1(67.37,63.63) v1(67.37,62.22) v1(67.37,60.8) v1(67.37,59.39) v1(67.37,57.97) v1(67.37,56.56) v1(67.37,55.14) v1(67.37,53.73) v1(67.37,52.31) v1(67.37,50.9) v1(67.37,49.48) v1(67.37,48.07) v1(67.37,46.65) v1(67.37,45.24) v1(67.37,43.83) v1(67.37,42.41) v1(67.37,41) v1(67.37,39.58) v1(67.37,38.17) v1(67.37,36.75) v1(67.37,35.34) v1(67.37,33.92) v1(67.37,32.51) v1(67.37,31.09) v1(67.37,29.68) v1(67.37,28.26) v1(67.37,26.85) v1(67.37,25.43) v1(67.37,24.02) v1(67.37,22.6) v1(67.37,21.19) v1(67.37,19.77) v1(67.52,7.06) v1(67.62,17.74) v1(67.62,15.84) v1(67.67,10.14) v1(68,8.77) v1(68.13,14.45) v1(68.52,88.53) v1(68.52,87.12) v1(68.52,85.7) v1(68.52,84.29) v1(68.52,82.87) v1(68.52,81.46) v1(68.52,80.04) v1(68.52,78.63) v1(68.52,77.21) v1(68.52,75.8) v1(68.52,74.38) v1(68.52,72.97) v1(68.52,71.55) v1(68.52,70.14) v1(68.52,68.72) v1(68.52,67.31) v1(68.52,65.9) v1(68.52,64.48) v1(68.52,63.07) v1(68.52,61.65) v1(68.52,60.24) v1(68.52,58.82) v1(68.52,57.41) v1(68.52,55.99) v1(68.52,54.58) v1(68.52,53.16) v1(68.52,51.75) v1(68.52,50.33) v1(68.52,48.92) v1(68.52,47.5) v1(68.52,46.09) v1(68.52,44.67) v1(68.52,43.26) v1(68.52,41.84) v1(68.52,40.43) v1(68.52,39.01) v1(68.52,37.6) v1(68.52,36.18) v1(68.52,34.77) v1(68.52,33.36) v1(68.52,31.94) v1(68.52,30.53) v1(68.52,29.11) v1(68.52,27.7) v1(68.52,26.28) v1(68.52,24.87) v1(68.52,23.45) v1(68.52,22.04) v1(68.52,20.62) v1(68.64,89.94) v1(68.62,18.74) v1(68.63,16.84) v1(68.93,6.93) v1(69.13,15.45) v1(69.34,8.31) v1(69.64,90.94) v1(69.62,19.74) v1(69.63,17.84) v1(69.91,89.04) v1(69.91,87.62) v1(69.91,86.21) v1(69.91,84.79) v1(69.91,83.38) v1(69.91,81.96) v1(69.91,80.55) v1(69.91,79.13) v1(69.91,77.72) v1(69.91,76.3) v1(69.91,74.89) v1(69.91,73.47) v1(69.91,72.06) v1(69.91,70.65) v1(69.91,69.23) v1(69.91,67.82) v1(69.91,66.4) v1(69.91,64.99) v1(69.91,63.57) v1(69.91,62.16) v1(69.91,60.74) v1(69.91,59.33) v1(69.91,57.91) v1(69.91,56.5) v1(69.91,55.08) v1(69.91,53.67) v1(69.91,52.25) v1(69.91,50.84) v1(69.91,49.42) v1(69.91,48.01) v1(69.91,46.59) v1(69.91,45.18) v1(69.91,43.76) v1(69.91,42.35) v1(69.91,40.93) v1(69.91,39.52) v1(69.91,38.11) v1(69.91,36.69) v1(69.91,35.28) v1(69.91,33.86) v1(69.91,32.45) v1(69.91,31.03) v1(69.91,29.62) v1(69.91,28.2) v1(69.91,26.79) v1(69.91,25.37) v1(69.91,23.96) v1(69.91,22.54) v1(69.91,21.13) v1(70.13,16.45) v1(70.21,20.39) v1(70.35,6.93) v1(70.65,91.94) v1(70.62,18.84) v1(70.8,90.14) v1(70.75,8.31) v1(71.06,79.7) v1(71.06,78.28) v1(71.06,76.87) v1(71.06,75.45) v1(71.06,74.04) v1(71.06,72.62) v1(71.06,71.21) v1(71.06,69.79) v1(71.06,68.38) v1(71.06,66.96) v1(71.06,65.55) v1(71.06,64.14) v1(71.06,62.72) v1(71.06,61.31) v1(71.06,59.89) v1(71.06,58.48) v1(71.06,57.06) v1(71.06,55.65) v1(71.06,54.23) v1(71.06,52.82) v1(71.06,51.4) v1(71.06,49.99) v1(71.06,48.57) v1(71.06,47.16) v1(71.06,45.74) v1(71.06,44.33) v1(71.06,42.91) v1(71.06,41.5) v1(71.06,40.08) v1(71.06,38.67) v1(71.06,37.25) v1(71.06,35.84) v1(71.06,34.42) v1(71.06,33.01) v1(71.06,31.6) v1(71.06,30.18) v1(71.06,28.77) v1(71.06,27.35) v1(71.06,25.94) v1(71.06,24.52) v1(71.06,23.11) v1(71.06,21.69) v1(71.13,17.45) v1(71.23,81.1) v1(71.37,112.01) v1(71.37,106.93) v1(71.37,101.85) v1(71.37,96.77) v1(71.37,86.61) v1(71.37,15.49) v1(71.37,10.41) v1(71.37,5.33) v1(71.65,92.94) v1(71.63,19.85) v1(71.8,91.14) v1(71.76,6.93) v1(72.05,8.89) v1(72.13,18.45) v1(72.35,81.97) v1(72.5,80.42) v1(72.45,79) v1(72.45,77.59) v1(72.45,76.17) v1(72.45,74.76) v1(72.45,73.35) v1(72.45,71.93) v1(72.45,70.52) v1(72.45,69.1) v1(72.45,67.69) v1(72.45,66.27) v1(72.45,64.86) v1(72.45,63.44) v1(72.45,62.03) v1(72.45,60.61) v1(72.45,59.2) v1(72.45,57.78) v1(72.45,56.37) v1(72.45,54.95) v1(72.45,53.54) v1(72.45,52.12) v1(72.45,50.71) v1(72.45,49.29) v1(72.45,47.88) v1(72.45,46.46) v1(72.45,45.05) v1(72.45,43.63) v1(72.45,42.22) v1(72.45,40.81) v1(72.45,39.39) v1(72.45,37.98) v1(72.45,36.56) v1(72.45,35.15) v1(72.45,33.73) v1(72.45,32.32) v1(72.45,30.9) v1(72.45,29.49) v1(72.45,28.07) v1(72.45,26.66) v1(72.45,25.24) v1(72.45,23.83) v1(72.45,22.41) v1(72.45,21) v1(72.65,93.94) v1(72.8,92.14) v1(72.89,7.78) v1(72.97,18.45) v1(72.97,17.04) v1(72.97,15.62) v1(72.97,14.21) v1(72.97,12.79) v1(72.97,11.38) v1(72.97,9.96) v1(73.13,19.45) v1(73.26,21.54) v1(73.6,62.65) v1(73.6,61.23) v1(73.6,59.82) v1(73.6,58.4) v1(73.6,56.99) v1(73.6,55.58) v1(73.6,54.16) v1(73.6,52.75) v1(73.6,51.33) v1(73.6,49.92) v1(73.6,48.5) v1(73.6,47.09) v1(73.6,45.67) v1(73.6,44.26) v1(73.6,42.84) v1(73.6,41.43) v1(73.6,40.01) v1(73.6,38.6) v1(73.6,37.18) v1(73.6,35.77) v1(73.6,34.35) v1(73.6,32.94) v1(73.6,31.52) v1(73.6,30.11) v1(73.6,28.69) v1(73.6,27.28) v1(73.6,25.86) v1(73.6,24.45) v1(73.6,23.04) v1(73.64,94.94) v1(73.8,93.14) v1(73.76,81.97) v1(73.91,80.59) v1(73.86,64.04) v1(73.89,8.78) v1(74.13,20.45) v1(74.35,18.61) v1(74.35,17.19) v1(74.35,15.78) v1(74.35,14.36) v1(74.35,12.95) v1(74.35,11.53) v1(74.35,10.12) v1(74.65,95.94) v1(74.8,94.14) v1(74.99,62.61) v1(74.99,61.19) v1(74.99,59.78) v1(74.99,58.36) v1(74.99,56.95) v1(74.99,55.53) v1(74.99,54.12) v1(74.99,52.7) v1(74.99,51.29) v1(74.99,49.87) v1(74.99,48.46) v1(74.99,47.04) v1(74.99,45.63) v1(74.99,44.21) v1(74.99,42.8) v1(74.99,41.38) v1(74.99,39.97) v1(74.99,38.55) v1(74.99,37.14) v1(74.99,35.73) v1(74.99,34.31) v1(74.99,32.9) v1(74.99,31.48) v1(74.99,30.07) v1(74.99,28.65) v1(74.99,27.24) v1(74.99,25.82) v1(74.99,24.41) v1(74.99,22.99) v1(74.99,21.58) v1(75.03,64.83) v1(75.18,112.01) v1(75.18,106.93) v1(75.18,81.97) v1(75.18,10.41) v1(75.18,5.33) v1(75.27,19.68) v1(75.32,80.59) v1(75.65,96.94) v1(75.8,95.14) v1(76.13,63.44) v1(76.14,39.99) v1(76.14,38.57) v1(76.14,37.16) v1(76.14,35.75) v1(76.14,34.33) v1(76.14,32.92) v1(76.14,31.5) v1(76.14,30.09) v1(76.14,28.67) v1(76.14,27.26) v1(76.14,25.84) v1(76.14,24.43) v1(76.14,23.01) v1(76.27,20.68) v1(76.45,101.85) v1(76.45,91.69) v1(76.45,86.61) v1(76.45,76.45) v1(76.45,71.37) v1(76.45,66.29) v1(76.45,64.83) v1(76.45,61.21) v1(76.45,56.13) v1(76.45,51.05) v1(76.45,45.97) v1(76.45,15.49) v1(76.59,81.97) v1(76.74,80.59) v1(76.98,41.13) v1(77.04,97.21) v1(77.04,95.83) v1(77.27,21.68) v1(77.43,60.63) v1(77.41,59.22) v1(77.54,63.44) v1(77.53,38.64) v1(77.53,37.22) v1(77.53,35.81) v1(77.53,34.39) v1(77.53,32.98) v1(77.53,31.56) v1(77.53,30.15) v1(77.53,28.73) v1(77.53,27.32) v1(77.53,25.9) v1(77.53,24.49) v1(77.71,57.84) v1(77.86,64.83) v1(78.01,81.97) v1(78.06,39.95) v1(78.15,80.59) v1(78.38,41.33) v1(78.45,97.21) v1(78.45,95.83) v1(78.43,61.63) v1(78.68,36.45) v1(78.68,31.38) v1(78.68,26.3) v1(78.8,59.79) v1(78.79,37.86) v1(78.8,32.79) v1(78.8,27.71) v1(78.96,63.44) v1(78.92,57.09) v1(79.28,64.83) v1(79.34,58.48) v1(79.38,35.22) v1(79.37,30.14) v1(79.37,25.06) v1(79.42,81.97) v1(79.47,39.95) v1(79.57,80.59) v1(79.62,95.97) v1(79.76,97.28) v1(79.76,72.14) v1(79.76,71.37) v1(79.76,70.61) v1(79.76,69.85) v1(79.76,46.74) v1(79.76,45.97) v1(79.76,45.21) v1(79.76,44.45) v1(79.79,41.33) v1(79.76,21.34) v1(79.76,20.57) v1(79.76,19.81) v1(79.76,19.05) v1(79.84,61.65) v1(79.86,38.79) v1(79.87,33.71) v1(79.88,28.63) v1(80.13,60.27) v1(80.26,98.04) v1(80.26,95) v1(80.23,37.34) v1(80.26,32.29) v1(80.26,27.21) v1(80.37,63.44) v1(80.33,57.09) v1(80.59,79.61) v1(80.59,78.19) v1(80.59,76.78) v1(80.59,75.36) v1(80.59,73.95) v1(80.52,72.64) v1(80.52,69.6) v1(80.59,54.21) v1(80.59,52.79) v1(80.59,51.38) v1(80.59,49.96) v1(80.59,48.55) v1(80.52,47.24) v1(80.52,44.2) v1(80.59,24.35) v1(80.59,22.79) v1(80.52,21.84) v1(80.52,18.8) v1(80.69,64.83) v1(80.75,58.48) v1(80.74,34.87) v1(80.74,29.79) v1(80.84,81.97) v1(80.89,39.95) v1(81.03,98.04) v1(81.03,95) v1(81.01,26.01) v1(81.21,41.33) v1(81.13,36.25) v1(81.13,31.17) v1(81.28,69.6) v1(81.26,61.65) v1(81.28,44.2) v1(81.27,38.79) v1(81.29,33.71) v1(81.29,28.63) v1(81.28,18.8) v1(81.53,101.85) v1(81.53,91.69) v1(81.53,86.61) v1(81.53,66.29) v1(81.54,60.27) v1(81.53,56.13) v1(81.56,55.23) v1(81.53,15.49) v1(81.64,37.41) v1(81.67,32.33) v1(81.68,27.25) v1(81.79,98.04) v1(81.79,95) v1(81.79,63.44) v1(81.75,57.09) v1(81.88,81.02) v1(81.97,79.61) v1(81.97,78.19) v1(81.97,76.78) v1(81.97,75.36) v1(81.97,73.95) v1(81.97,52.79) v1(81.97,51.38) v1(81.97,49.96) v1(81.97,48.55) v1(81.97,24.98) v1(81.97,23.56) v1(81.97,22) v1(82.04,72.64) v1(82.04,69.6) v1(82.11,64.83) v1(82.04,47.24) v1(82.04,44.2) v1(82.04,18.8) v1(82.17,58.48) v1(82.16,34.87) v1(82.15,29.79) v1(82.3,39.95) v1(82.55,98.04) v1(82.55,95) v1(82.55,36.25) v1(82.54,31.17) v1(82.67,61.65) v1(82.62,41.33) v1(82.69,38.79) v1(82.7,33.71) v1(82.7,28.63) v1(82.8,97.28) v1(82.8,96.52) v1(82.8,95.76) v1(82.8,72.14) v1(82.8,71.37) v1(82.8,70.61) v1(82.8,69.85) v1(82.8,46.74) v1(82.8,45.97) v1(82.8,45.21) v1(82.8,44.45) v1(82.8,21.34) v1(82.8,20.57) v1(82.8,19.81) v1(82.8,19.05) v1(82.83,53.92) v1(82.96,60.27) v1(82.97,55.37) v1(83.06,37.41) v1(83.09,32.33) v1(83.09,27.25) v1(83.13,62.99) v1(83.13,56.78) v1(83.52,64.78) v1(83.58,58.37) v1(83.57,34.83) v1(83.57,29.75) v1(83.71,39.78) v1(83.96,36.25) v1(83.95,31.17) v1(84.1,54.55) v1(84.04,41.33) v1(84.18,60.98) v1(84.43,37.73) v1(84.46,32.68) v1(84.46,27.6) v1(84.51,63.77) v1(84.51,62.35) v1(84.51,57.31) v1(84.51,55.9) v1(85.07,40.37) v1(85.03,35.33) v1(85.03,30.25) v1(85.15,38.95) v1(85.15,33.92) v1(85.15,28.84) v2(30.48,11.34) v2(33.02,11.34) v2(53.34,11.34) v2(55.88,11.34) v3(29.21,11.34) v3(31.75,11.34) v3(34.29,11.34) v3(52.07,11.34) v3(54.61,11.34) v3(57.15,11.34)
